# EAGLE board A10-OLinuXino-Lime (EAGLE 6.2), part 1 of 5
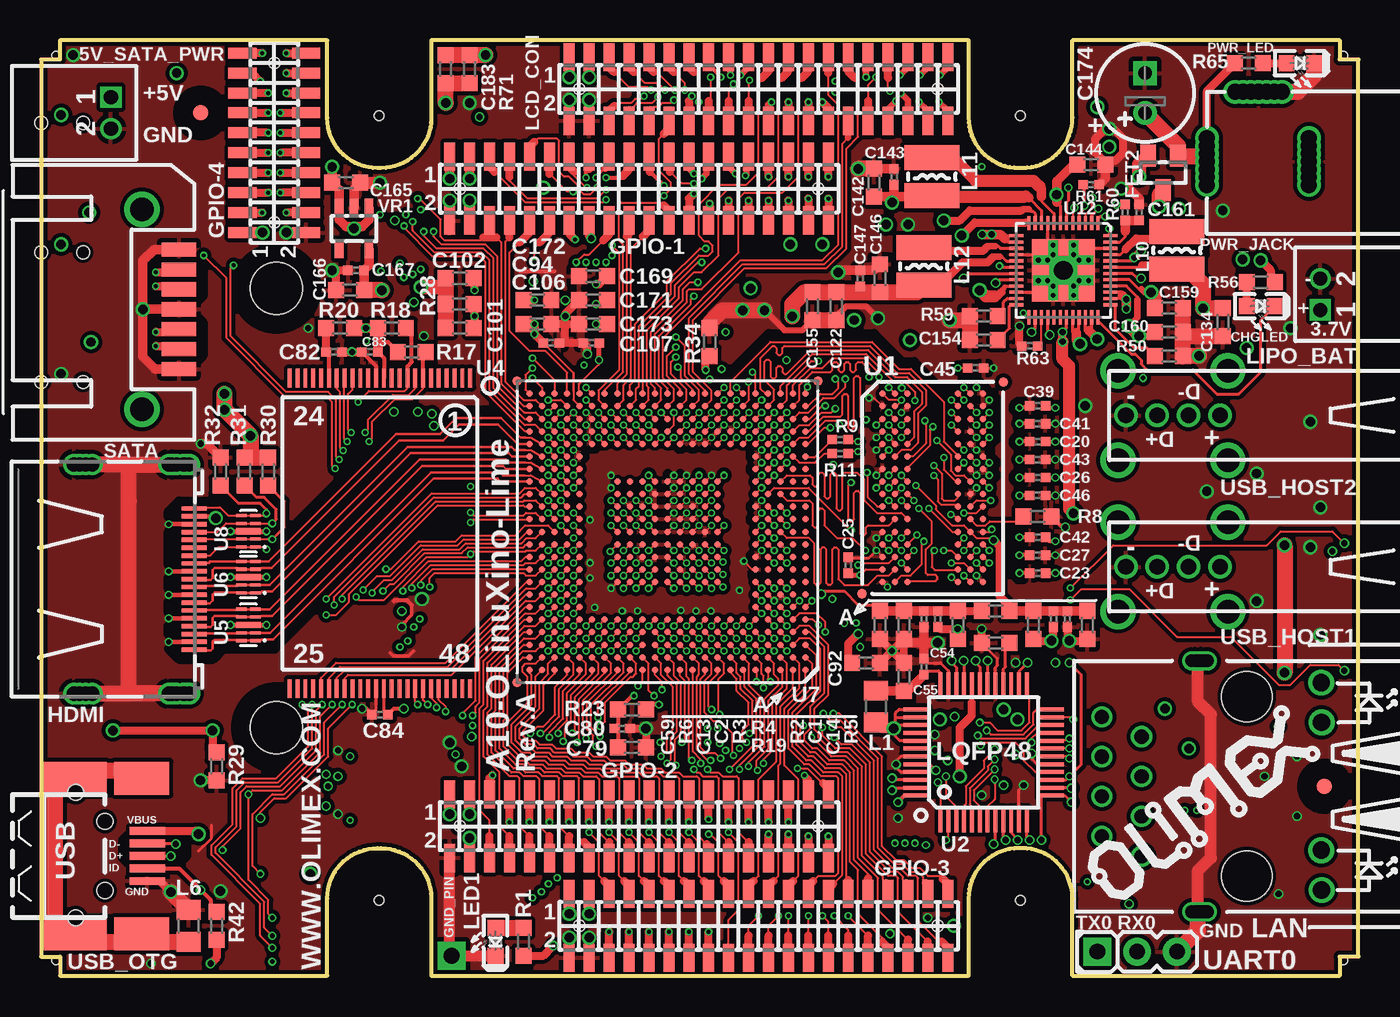
[diagram p0: board, top side]
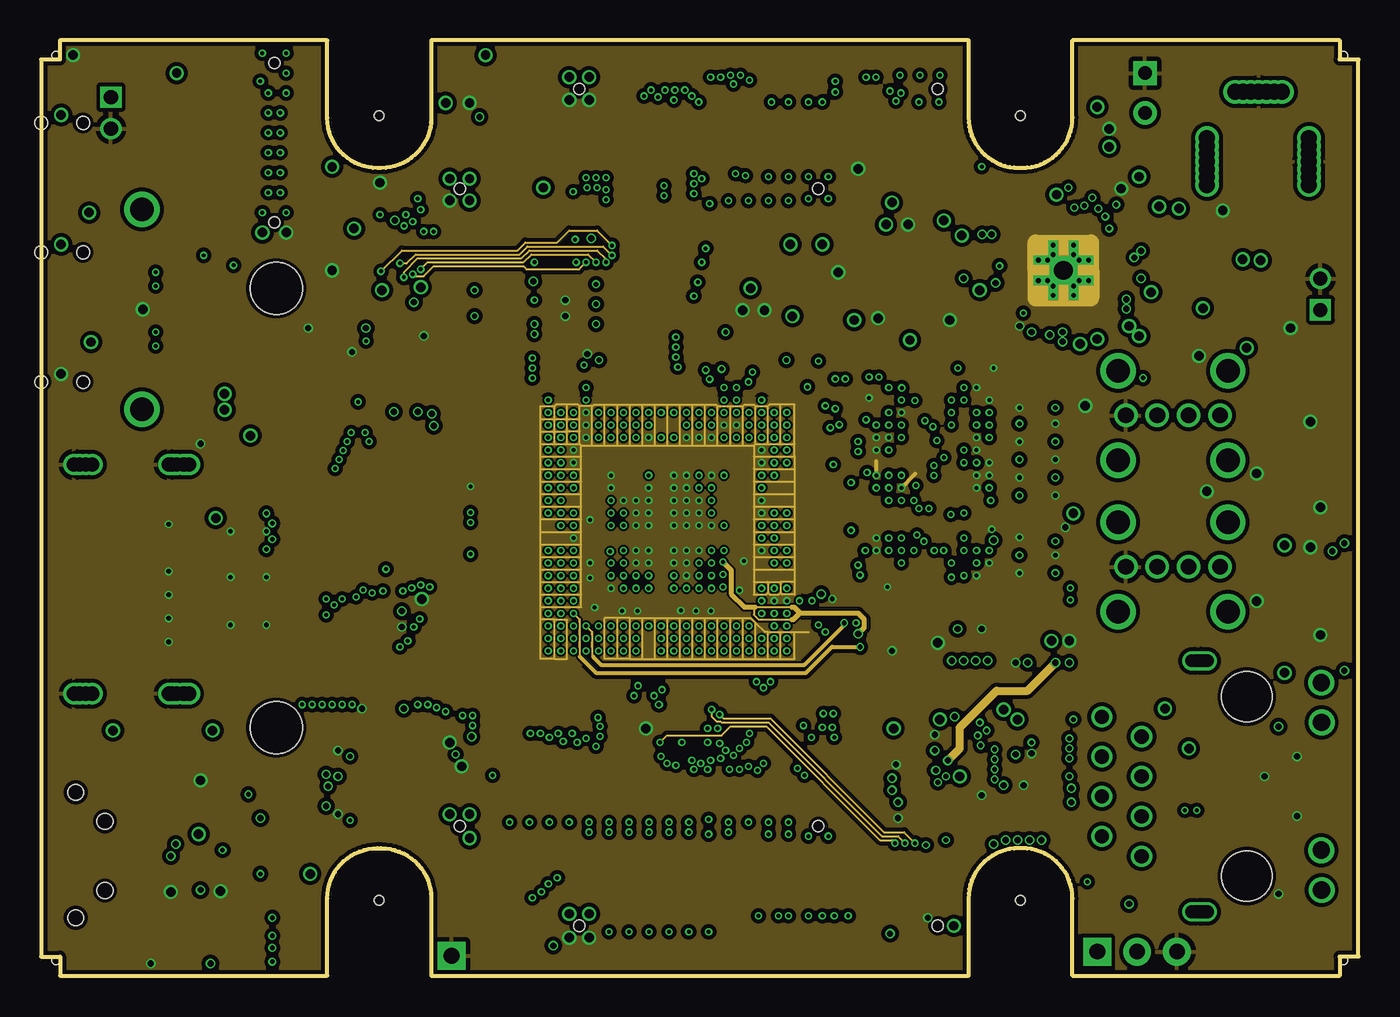
[diagram p1: board, inner layer Route2]
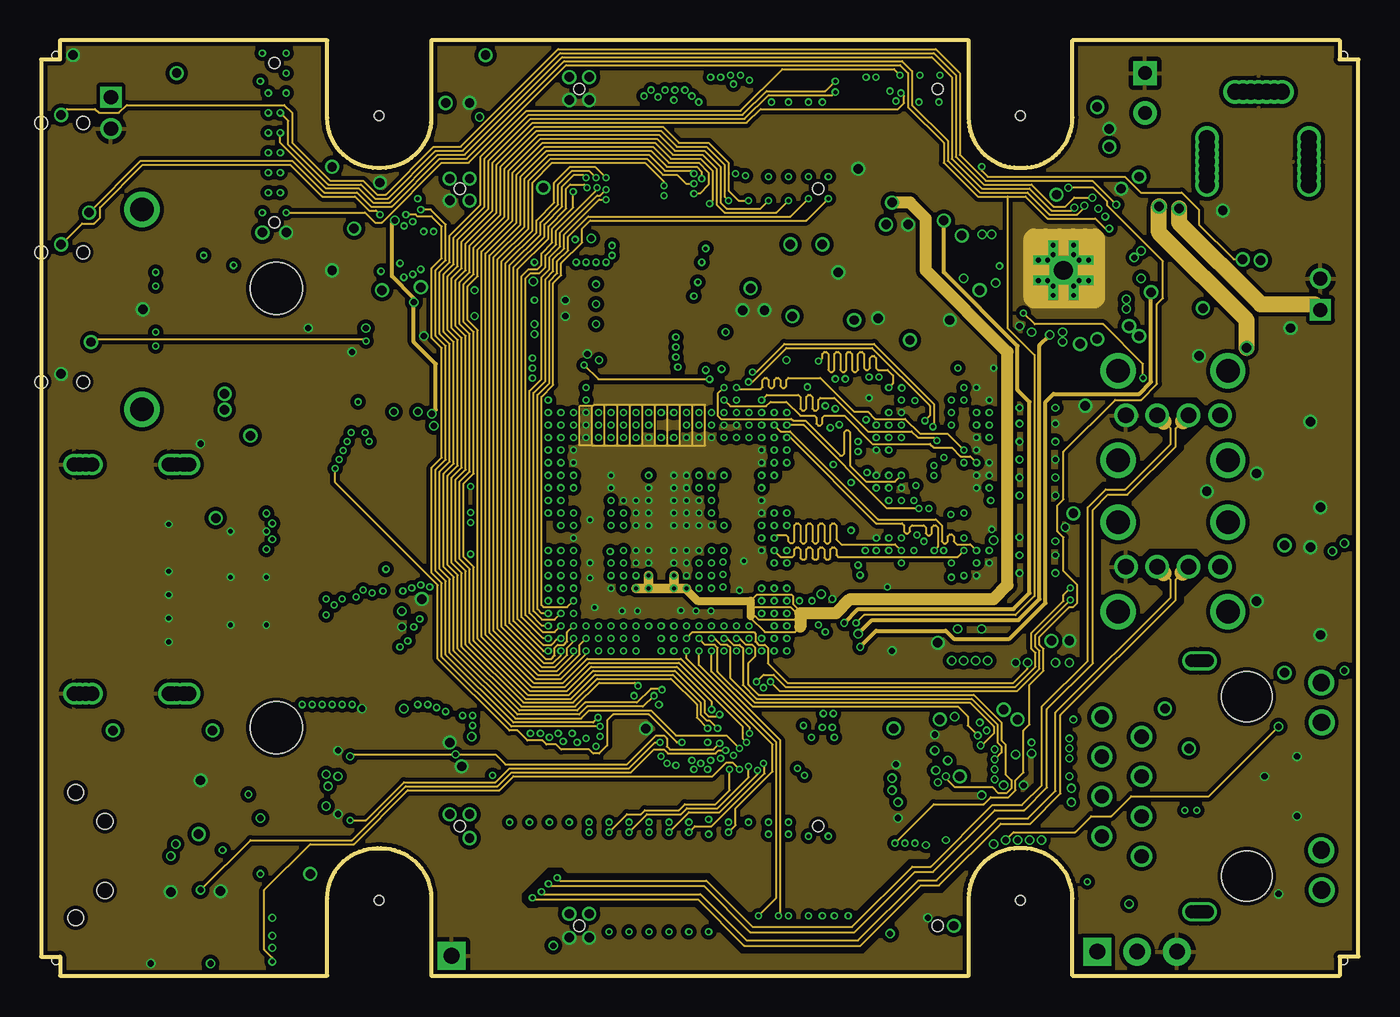
[diagram p2: board, inner layer Route3]
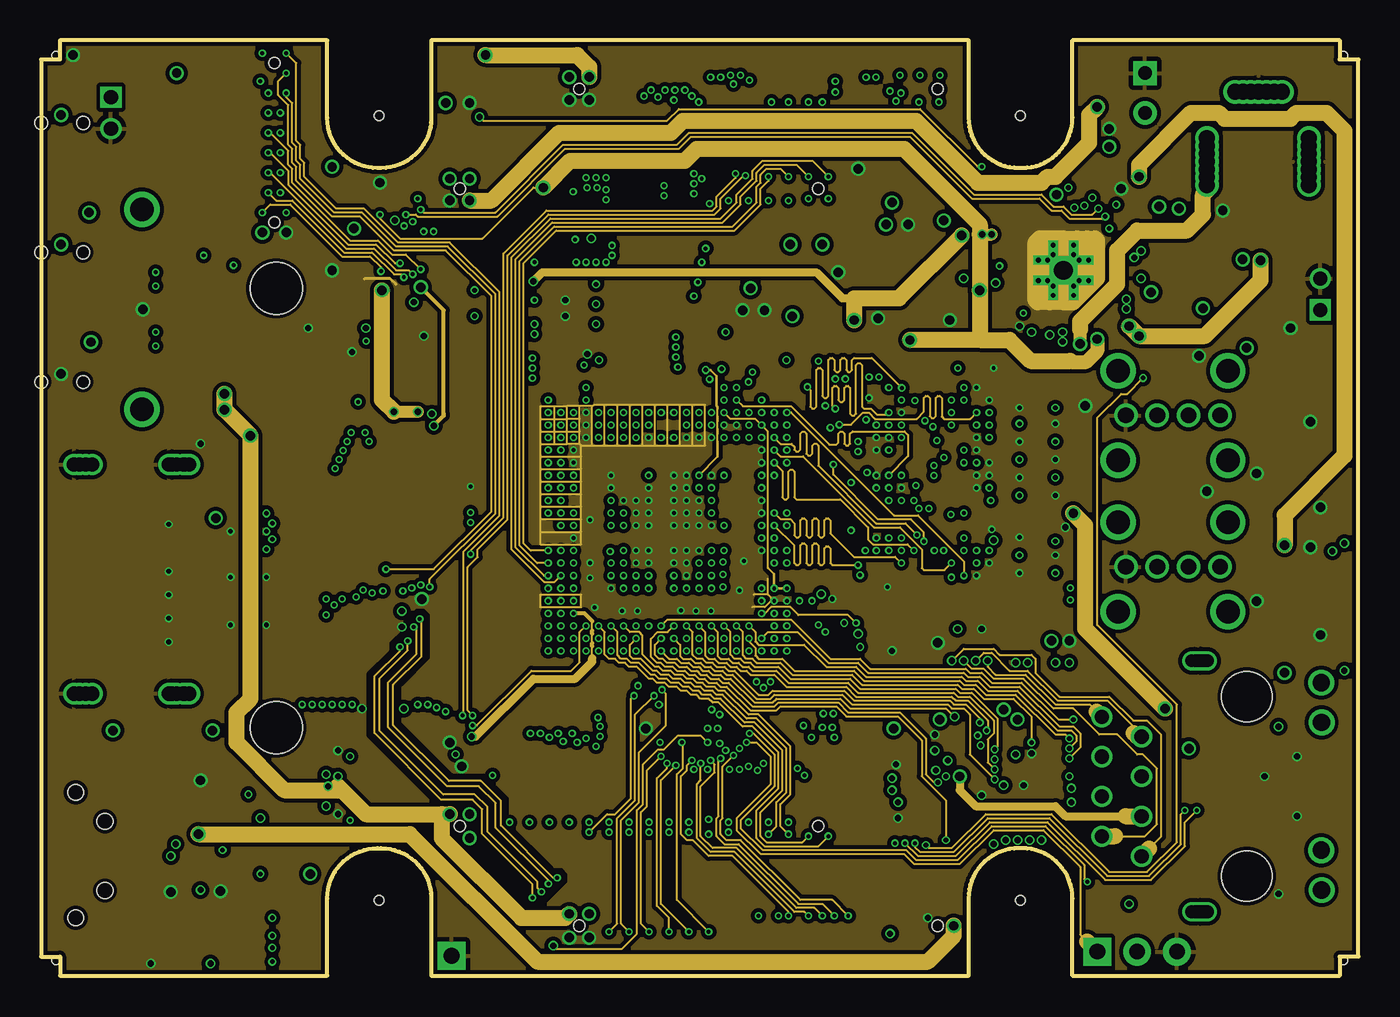
[diagram p3: board, inner layer Route14]
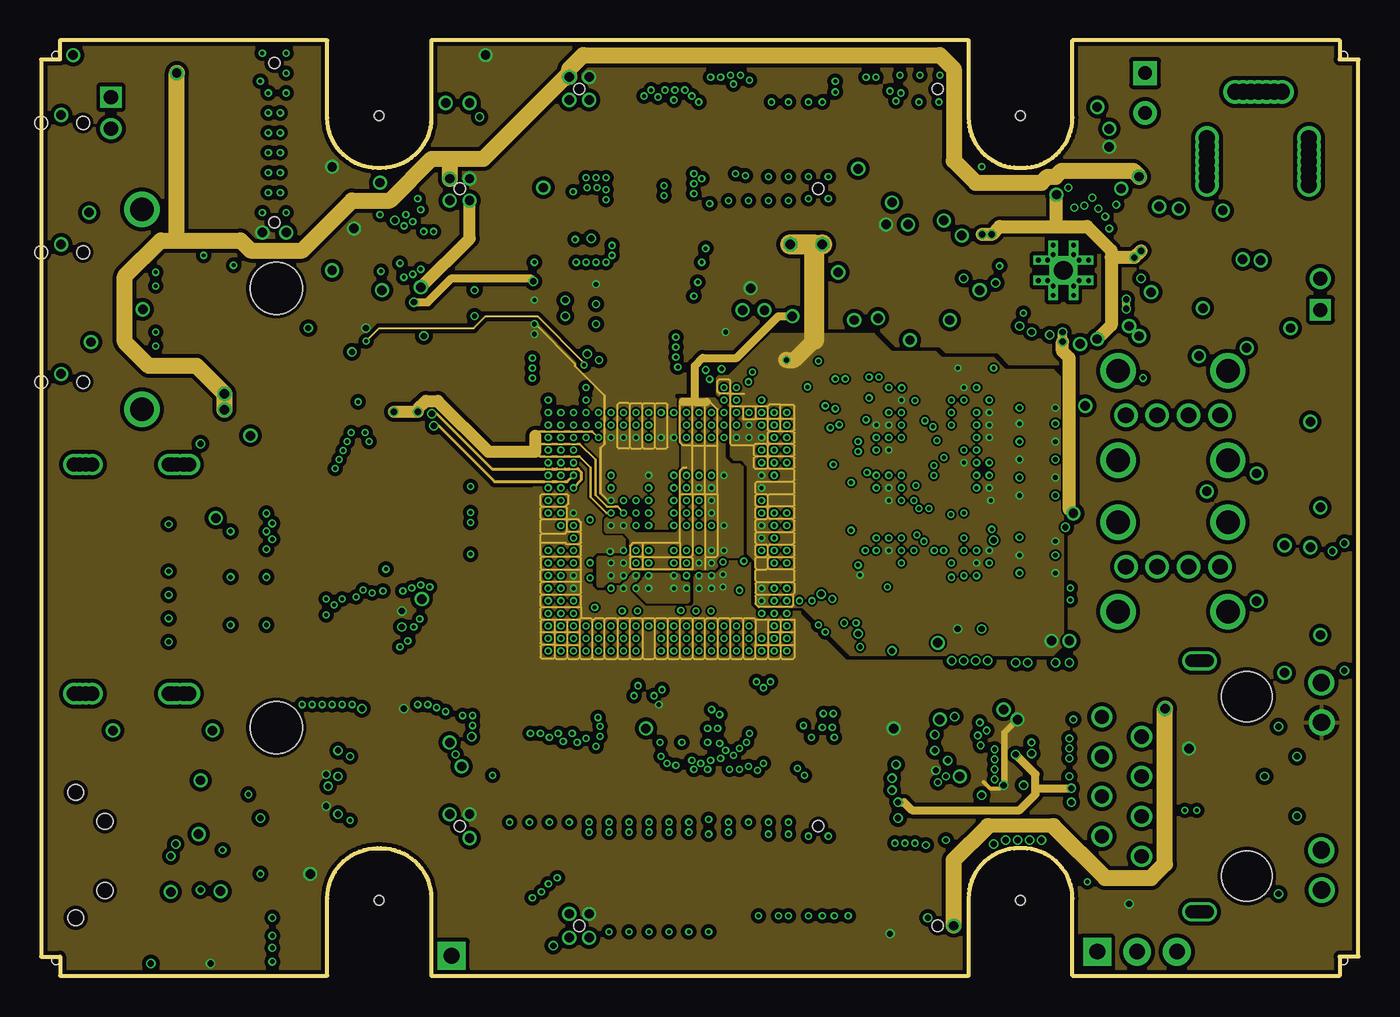
[diagram p4: board, inner layer Route15]
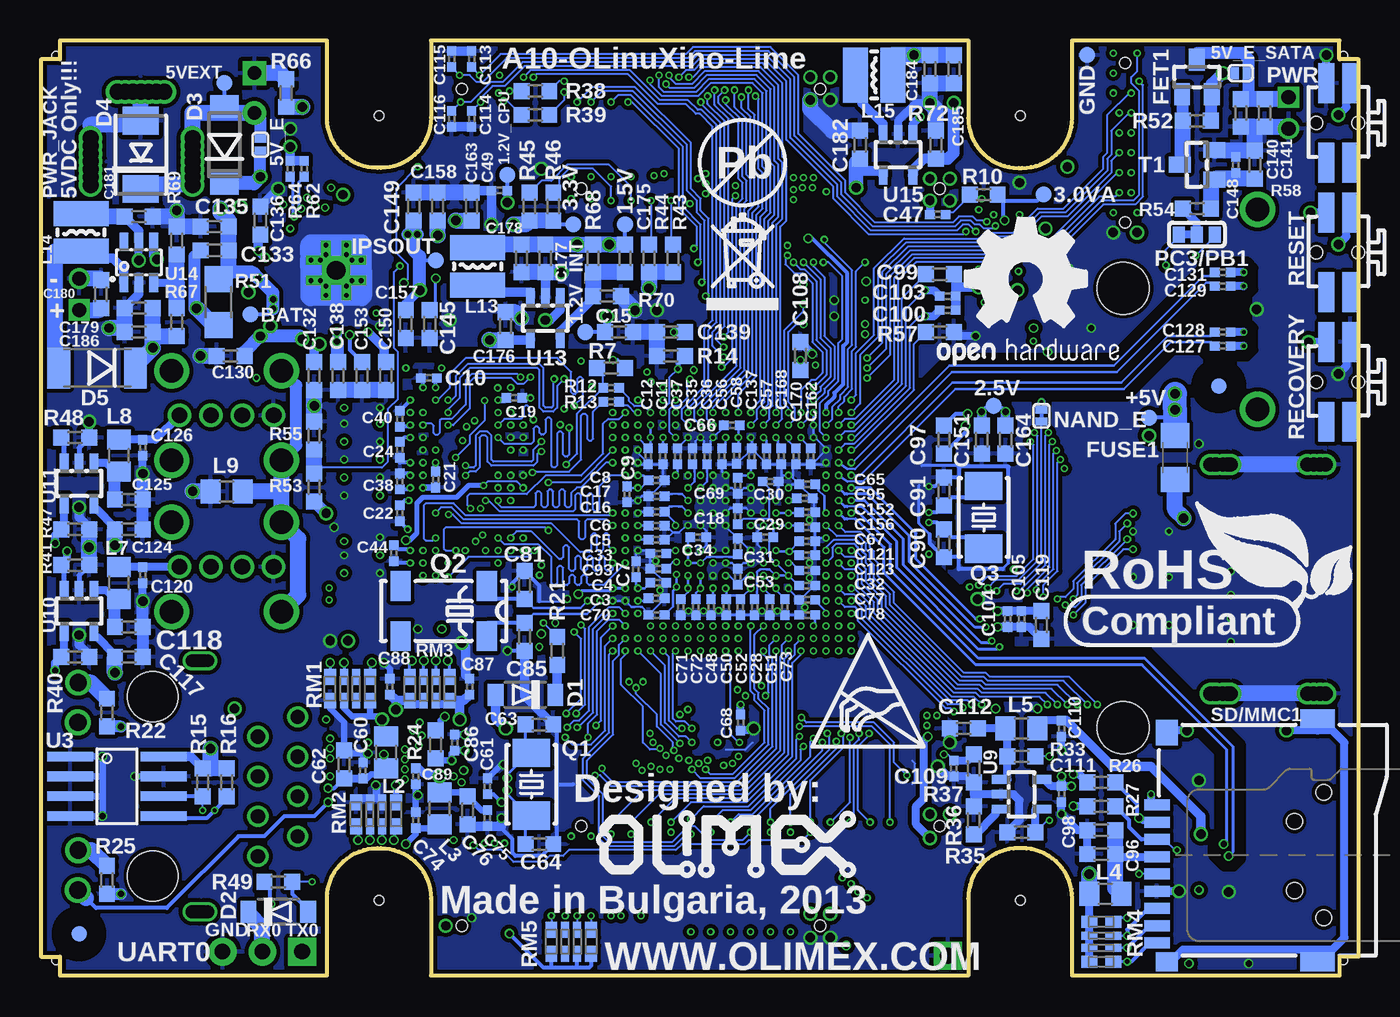
[diagram p5: board, bottom side, seen from below]

Size 83.96 x 59.61 mm. Coordinates in mm from the lower left corner, seen from the top.
Copper layers (1*2*3*14*15*16): Top 0.035mm / dielectric 0.1mm / Route2 0.035mm / dielectric 0.1mm / Route3 0.035mm / dielectric 1mm / Route14 0.035mm / dielectric 0.1mm / Route15 0.035mm / dielectric 0.1mm / Bottom 0.035mm
Design rules: minimum track width 4.5mil, minimum drill 10mil, track to track 5mil, track to pad 5mil, pad to pad 5mil, via to via 5mil, smd to smd 1mil, copper to edge 10mil, drill to drill 8mil, minimum pad ring 6mil, minimum via ring 4mil, stop-mask expansion 4mil, vias tented up to drill 25mil, thermal gap 12mil
tRestrict: 187 lines
bRestrict: 118 lines

## Footprints (pad centres in the part's own frame; a part is rotated, then mirrored left to right if it is on the bottom)
TESTPAD_40-ROUND = smd 1.016 x 1.016: 1 0,0
SJ_1_SMALLER = smd 0.508 x 0.762: 1 -0.381,0; 2 0.381,0
DW02R = drill 0.9 square: 1 -1,0 | drill 0.9: 2 1,0
C0402_TI = smd 0.61 x 0.584: 1 -0.508,0; 2 0.508,0
C0603_DWS = smd 1.016 x 1.016: 1 -0.889,0; 2 0.889,0
E2,5-6,3 = drill 0.864 pad 1.524: + -1.27,0 | drill 0.864 pad 1.524 square: - 1.27,0
LED-0603 = smd 1.016 x 1.016: A 0.889,0; C -0.889,0
SOD-123 = smd 1 x 1.4: A 1.9,0; C -1.9,0
MLL-41 = smd 1.45 x 1.8: A 2.445,0; K -2.445,0
DO214AA = smd 1.778 x 2.286: A 2.177,0; C -2.177,0
MELF-MLL41 = smd 1.45 x 2.6: 1 -2.445,0; 2 2.445,0
SOT23 = smd 1 x 1.4: 1 -0.95,-1.1; 2 0.95,-1.1; 3 0,1.1
1206 = smd 1.6 x 1.8: 1 -1.4,0; 2 1.4,0
TEST_PAD40/70/SQUARE = drill 1.016 pad 1.778 square: P$1 0,0
YA-V36P-2X20-LF = smd 0.7 x 1.8: 1 -12.065,2.032; 2 -12.065,-2.032; 3 -10.795,2.032; 4 -10.795,-2.032; 5 -9.525,2.032; 6 -9.525,-2.032; 7 -8.255,2.032; 8 -8.255,-2.032; 9 -6.985,2.032; 10 -6.985,-2.032; 11 -5.715,2.032; 12 -5.715,-2.032; 13 -4.445,2.032; 14 -4.445,-2.032; 15 -3.175,2.032; 16 -3.175,-2.032; 17 -1.905,2.032; 18 -1.905,-2.032; 19 -0.635,2.032; 20 -0.635,-2.032; 21 0.635,2.032; 22 0.635,-2.032; 23 1.905,2.032; 24 1.905,-2.032; 25 3.175,2.032; 26 3.175,-2.032; 27 4.445,2.032; 28 4.445,-2.032; 29 5.715,2.032; 30 5.715,-2.032; 31 6.985,2.032; 32 6.985,-2.032; 33 8.255,2.032; 34 8.255,-2.032; 35 9.525,2.032; 36 9.525,-2.032; 37 10.795,2.032; 38 10.795,-2.032; 39 12.065,2.032; 40 12.065,-2.032 | hole 0.7: -11.43,0; 11.43,0
YA-V36P-2X10-LF = smd 0.7 x 1.8: 1 -5.715,2.032; 2 -5.715,-2.032; 3 -4.445,2.032; 4 -4.445,-2.032; 5 -3.175,2.032; 6 -3.175,-2.032; 7 -1.905,2.032; 8 -1.905,-2.032; 9 -0.635,2.032; 10 -0.635,-2.032; 11 0.635,2.032; 12 0.635,-2.032; 13 1.905,2.032; 14 1.905,-2.032; 15 3.175,2.032; 16 3.175,-2.032; 17 4.445,2.032; 18 4.445,-2.032; 19 5.715,2.032; 20 5.715,-2.032 | hole 0.7: -5.08,0; 5.08,0
HDMI-SWM-19 = smd 1.6 x 0.28: 1 0.8,4.5; 2 0.8,4; 3 0.8,3.5; 4 0.8,3; 5 0.8,2.5; 6 0.8,2; 7 0.8,1.5; 8 0.8,1; 9 0.8,0.5; 10 0.8,0; 11 0.8,-0.5; 12 0.8,-1; 13 0.8,-1.5; 14 0.8,-2; 15 0.8,-2.5; 16 0.8,-3; 17 0.8,-3.5; 18 0.8,-4; 19 0.8,-4.5 | drill 0.9: P$5 1.5,7.3; P$7 7.7,7.3; P$9 7.7,-7.3; P$11 1.5,-7.3; P$13 1.9,7.3; P$15 8.1,7.3; P$18 8.1,-7.3; P$20 1.9,-7.3; P$21 2.2,7.3; P$22 1.4,7.3; P$23 1.4,-7.3; P$24 2.2,-7.3; P$25 1.1,7.3; P$26 1.1,-7.3; P$27 7.3,-7.3; P$28 7.3,7.3; SH1 2.4,7.3; SH2 8.45,7.3; SH3 8.45,-7.3; SH4 2.4,-7.3
L0805_5MIL_DWS = smd 1.27 x 1.524: 1 -1.016,0; 2 1.016,0
CD32 = smd 3.5 x 1.6: 1 0,1.2; 2 0,-1.2
RJLBC-060TC1_MILLING = drill 0.9: 1 -4.455,6.7; 2 -3.185,9.24; 3 -1.915,6.7; 4 -0.645,9.24; 5 0.625,6.7; 6 1.895,9.24; 7 3.165,6.7; 8 4.435,9.24 | drill 0.8: _1 -8,2.5; _2 -8,2.7; _3 -8,2.9; _4 -8,3.3; _5 -8,3.5; _6 8,3.5; _7 8,3.3; _8 8,2.9; _9 8,2.7; _10 8,2.5; GND1 -8,3.1; GND2 8,3.1 | drill 1.1: AG 4.07,-4.773; AY -6.61,-4.773; KG 6.61,-4.748; KY -4.07,-4.748 | hole 3.2: -5.715,0; 5.715,0
SJ_1_SMALLER_CLOSE_10MILS = smd 0.508 x 0.762: 1 -0.381,0; 2 0.381,0
SJ_2_SMALL_23_TIED = smd 0.762 x 1.016: 1 -1.143,0; 2 0,0; 3 1.143,0
SW_TAKT3X4 = smd 2.54 x 1.016: 1_1 -2.54,0.762; 1_2 2.54,0.762; 2_1 -2.54,-0.762; 2_2 2.54,-0.762 | hole 0.8: 0,-1.397; 0,1.27
PWR_JACK_UNI_MILLING = drill 1: + 0,4.75; +1 0,5.25; +2 0,5.75; +3 0,6.25; +4 0,4.25; +5 0,3.75; +6 0,3.25; - -6.5,4.75; -1 -6.5,5.25; -2 -6.5,5.75; -3 -6.5,4.25; -4 -6.5,3.75; -5 -6.5,6.25; -6 -6.5,3.25; -- -3.3,0.3; --1 -3.8,0.3; --2 -4.3,0.3; --3 -4.8,0.3; --4 -2.8,0.3; --5 -2.3,0.3; --6 -1.8,0.3
HCX-4S = smd 1.8 x 2.4: 1 -2,0; 2 2,0
MC-306 = smd 1.3 x 1.9: 1 -2.75,-1.6; 2 2.75,-1.6; 3 2.75,1.6; 4 -2.75,1.6
R0603_5MIL_DWS = smd 1.016 x 1.016: 1 -0.889,0; 2 0.889,0
R0402_TI = smd 0.61 x 0.584: 1 -0.508,0; 2 0.508,0
R1206_5MIL_WS = smd 1.651 x 1.778: 1 -1.46,0; 2 1.46,0
0603_0R = smd 1.016 x 1.016: 1 -0.889,0; 2 0.889,0
R_MATRIX_4 = smd 1.016 x 0.762: 1.1 -0.762,1.27; 1.2 0.762,1.27; 4.1 -0.762,-1.27; 4.2 0.762,-1.27 | smd 1.016 x 0.508: 2.1 -0.762,0.381; 2.2 0.762,0.381; 3.1 -0.762,-0.381; 3.2 0.762,-0.381
SATA-PWA-07 = smd 0.9 x 2.2: 1 4.5,1; 2 5.77,1; 3 7.04,1; 4 8.31,1; 5 9.58,1; 6 10.85,1; 7 12.12,1 | drill 1.5: P$8 1.94,3.36; P$9 14.68,3.36
TFC-WPAPR-08 = smd 0.7 x 1.6: 1 -3.2,-0.125; 2 -2.1,-0.125; 3 -1,-0.125; 4 0.1,-0.125; 5 1.2,-0.125; 6 2.3,-0.125; 7 3.4,-0.125; 8 4.5,-0.125; 9 5.6,-0.125 | smd 1.2 x 1.4: 10 6.8,0.5 | smd 1.6 x 1.4: 11 -7.8,0.5 | smd 1.2 x 2.2: 12 6.8,10.1; 13 -8.7,10.1 | hole 1: 4,10.5; -4,10.5
FBGA96_MEM = smd 0.4 x 0.4: A1 -3.2,6; A2 -2.4,6; A3 -1.6,6; A7 1.6,6; A8 2.4,6; A9 3.2,6; B1 -3.2,5.2; B2 -2.4,5.2; B3 -1.6,5.2; B7 1.6,5.2; B8 2.4,5.2; B9 3.2,5.2; C1 -3.2,4.4; C2 -2.4,4.4; C3 -1.6,4.4; C7 1.6,4.4; C8 2.4,4.4; C9 3.2,4.4; D1 -3.2,3.6; D2 -2.4,3.6; D3 -1.6,3.6; D7 1.6,3.6; D8 2.4,3.6; D9 3.2,3.6; E1 -3.2,2.8; E2 -2.4,2.8; E3 -1.6,2.8; E7 1.6,2.8; E8 2.4,2.8; E9 3.2,2.8; F1 -3.2,2; F2 -2.4,2; F3 -1.6,2; F7 1.6,2; F8 2.4,2; F9 3.2,2; G1 -3.2,1.2; G2 -2.4,1.2; G3 -1.6,1.2; G7 1.6,1.2; G8 2.4,1.2; G9 3.2,1.2; H1 -3.2,0.4; H2 -2.4,0.4; H3 -1.6,0.4; H7 1.6,0.4; H8 2.4,0.4; H9 3.2,0.4; J1 -3.2,-0.4; J2 -2.4,-0.4; J3 -1.6,-0.4; J7 1.6,-0.4; J8 2.4,-0.4; J9 3.2,-0.4; K1 -3.2,-1.2; K2 -2.4,-1.2; K3 -1.6,-1.2; K7 1.6,-1.2; K8 2.4,-1.2; K9 3.2,-1.2; L1 -3.2,-2; L2 -2.4,-2; L3 -1.6,-2; L7 1.6,-2; L8 2.4,-2; L9 3.2,-2; M1 -3.2,-2.8; M2 -2.4,-2.8; M3 -1.6,-2.8; M7 1.6,-2.8; M8 2.4,-2.8; M9 3.2,-2.8; N1 -3.2,-3.6; N2 -2.4,-3.6; N3 -1.6,-3.6; N7 1.6,-3.6; N8 2.4,-3.6; N9 3.2,-3.6; P1 -3.2,-4.4; P2 -2.4,-4.4; P3 -1.6,-4.4; P7 1.6,-4.4; P8 2.4,-4.4; P9 3.2,-4.4; R1 -3.2,-5.2; R2 -2.4,-5.2; R3 -1.6,-5.2; R7 1.6,-5.2; R8 2.4,-5.2; R9 3.2,-5.2; T1 -3.2,-6; T2 -2.4,-6; T3 -1.6,-6; T7 1.6,-6; T8 2.4,-6; T9 3.2,-6 | smd 0.6 x 0.6: FID1 -4.5,-6.75; FID2 4.5,6.75
LQFP48 = smd 0.254 x 1.6: 1 -2.75,-4.3; 2 -2.25,-4.3; 3 -1.75,-4.3; 4 -1.25,-4.3; 5 -0.75,-4.3; 6 -0.25,-4.3; 7 0.25,-4.3; 8 0.75,-4.3; 9 1.25,-4.3; 10 1.75,-4.3; 11 2.25,-4.3; 12 2.75,-4.3; 25 2.75,4.3; 26 2.25,4.3; 27 1.75,4.3; 28 1.25,4.3; 29 0.75,4.3; 30 0.25,4.3; 31 -0.25,4.3; 32 -0.75,4.3; 33 -1.25,4.3; 34 -1.75,4.3; 35 -2.25,4.3; 36 -2.75,4.3 | smd 1.6 x 0.254: 13 4.3,-2.75; 14 4.3,-2.25; 15 4.3,-1.75; 16 4.3,-1.25; 17 4.3,-0.75; 18 4.3,-0.25; 19 4.3,0.25; 20 4.3,0.75; 21 4.3,1.25; 22 4.3,1.75; 23 4.3,2.25; 24 4.3,2.75; 37 -4.3,2.75; 38 -4.3,2.25; 39 -4.3,1.75; 40 -4.3,1.25; 41 -4.3,0.75; 42 -4.3,0.25; 43 -4.3,-0.25; 44 -4.3,-0.75; 45 -4.3,-1.25; 46 -4.3,-1.75; 47 -4.3,-2.25; 48 -4.3,-2.75
SO-08MN = smd 0.61 x 2.921: 1 -1.905,-2.981; 2 -0.635,-2.981; 3 0.635,-2.981; 4 1.905,-2.981; 5 1.905,2.981; 6 0.635,2.981; 7 -0.635,2.981; 8 -1.905,2.981
TSOP48 = smd 0.25 x 1.2: 1 -5.75,-9.9; 2 -5.25,-9.9; 3 -4.75,-9.9; 4 -4.25,-9.9; 5 -3.75,-9.9; 6 -3.25,-9.9; 7 -2.75,-9.9; 8 -2.25,-9.9; 9 -1.75,-9.9; 10 -1.25,-9.9; 11 -0.75,-9.9; 12 -0.25,-9.9; 13 0.25,-9.9; 14 0.75,-9.9; 15 1.25,-9.9; 16 1.75,-9.9; 17 2.25,-9.9; 18 2.75,-9.9; 19 3.25,-9.9; 20 3.75,-9.9; 21 4.25,-9.9; 22 4.75,-9.9; 23 5.25,-9.9; 24 5.75,-9.9; 25 5.75,9.9; 26 5.25,9.9; 27 4.75,9.9; 28 4.25,9.9; 29 3.75,9.9; 30 3.25,9.9; 31 2.75,9.9; 32 2.25,9.9; 33 1.75,9.9; 34 1.25,9.9; 35 0.75,9.9; 36 0.25,9.9; 37 -0.25,9.9; 38 -0.75,9.9; 39 -1.25,9.9; 40 -1.75,9.9; 41 -2.25,9.9; 42 -2.75,9.9; 43 -3.25,9.9; 44 -3.75,9.9; 45 -4.25,9.9; 46 -4.75,9.9; 47 -5.25,9.9; 48 -5.75,9.9
SLP2510P8 = smd 0.2 x 0.675: 1 -1,-0.438; 2 -0.5,-0.438; 4 0.5,-0.438; 5 1,-0.438; 6 1,0.438; 7 0.5,0.438; 9 -0.5,0.438; 10 -1,0.438 | smd 0.4 x 0.775: 3 0,-0.388; 8 0,0.388
TFBGA441 = smd 0.4 x 0.4: A1 -8.8,8.8; A2 -8,8.8; A3 -7.2,8.8; A4 -6.4,8.8; A5 -5.6,8.8; A6 -4.8,8.8; A7 -4,8.8; A8 -3.2,8.8; A9 -2.4,8.8; A10 -1.6,8.8; A11 -0.8,8.8; A12 0,8.8; A13 0.8,8.8; A14 1.6,8.8; A15 2.4,8.8; A16 3.2,8.8; A17 4,8.8; A18 4.8,8.8; A19 5.6,8.8; A20 6.4,8.8; A21 7.2,8.8; A22 8,8.8; A23 8.8,8.8; AA1 -8.8,-7.2; AA2 -8,-7.2; AA3 -7.2,-7.2; AA4 -6.4,-7.2; AA5 -5.6,-7.2; AA6 -4.8,-7.2; AA7 -4,-7.2; AA8 -3.2,-7.2; AA9 -2.4,-7.2; AA10 -1.6,-7.2; AA11 -0.8,-7.2; AA12 0,-7.2; AA13 0.8,-7.2; AA14 1.6,-7.2; AA15 2.4,-7.2; AA16 3.2,-7.2; AA17 4,-7.2; AA18 4.8,-7.2; AA19 5.6,-7.2; AA20 6.4,-7.2; AA21 7.2,-7.2; AA22 8,-7.2; AA23 8.8,-7.2; AB1 -8.8,-8; AB2 -8,-8; AB3 -7.2,-8; AB4 -6.4,-8; AB5 -5.6,-8; AB6 -4.8,-8; AB7 -4,-8; AB8 -3.2,-8; AB9 -2.4,-8; AB10 -1.6,-8; AB11 -0.8,-8; AB12 0,-8; AB13 0.8,-8; AB14 1.6,-8; AB15 2.4,-8; AB16 3.2,-8; AB17 4,-8; AB18 4.8,-8; AB19 5.6,-8; AB20 6.4,-8; AB21 7.2,-8; AB22 8,-8; AB23 8.8,-8; AC1 -8.8,-8.8; AC2 -8,-8.8; AC3 -7.2,-8.8; AC4 -6.4,-8.8; AC5 -5.6,-8.8; AC6 -4.8,-8.8; AC7 -4,-8.8; AC8 -3.2,-8.8; AC9 -2.4,-8.8; AC10 -1.6,-8.8; AC11 -0.8,-8.8; AC12 0,-8.8; AC13 0.8,-8.8; AC14 1.6,-8.8; AC15 2.4,-8.8; AC16 3.2,-8.8; AC17 4,-8.8; AC18 4.8,-8.8; AC19 5.6,-8.8; AC20 6.4,-8.8; AC21 7.2,-8.8; AC22 8,-8.8; AC23 8.8,-8.8; B1 -8.8,8; B2 -8,8; B3 -7.2,8; B4 -6.4,8; B5 -5.6,8; B6 -4.8,8; B7 -4,8; B8 -3.2,8; B9 -2.4,8; B10 -1.6,8; B11 -0.8,8; B12 0,8; B13 0.8,8; B14 1.6,8; B15 2.4,8; B16 3.2,8; B17 4,8; B18 4.8,8; B19 5.6,8; B20 6.4,8; B21 7.2,8; B22 8,8; B23 8.8,8; C1 -8.8,7.2; C2 -8,7.2; C3 -7.2,7.2; C4 -6.4,7.2; C5 -5.6,7.2; C6 -4.8,7.2; C7 -4,7.2; C8 -3.2,7.2; C9 -2.4,7.2; C10 -1.6,7.2; C11 -0.8,7.2; C12 0,7.2; C13 0.8,7.2; C14 1.6,7.2; C15 2.4,7.2; C16 3.2,7.2; C17 4,7.2; C18 4.8,7.2; C19 5.6,7.2; C20 6.4,7.2; C21 7.2,7.2; C22 8,7.2; C23 8.8,7.2; D1 -8.8,6.4; D2 -8,6.4; D3 -7.2,6.4; D4 -6.4,6.4; D5 -5.6,6.4; D6 -4.8,6.4; D7 -4,6.4; D8 -3.2,6.4; D9 -2.4,6.4; D10 -1.6,6.4; D11 -0.8,6.4; D12 0,6.4; D13 0.8,6.4; D14 1.6,6.4; D15 2.4,6.4; D16 3.2,6.4; D17 4,6.4; D18 4.8,6.4; D19 5.6,6.4; D20 6.4,6.4; D21 7.2,6.4; D22 8,6.4; D23 8.8,6.4; E1 -8.8,5.6; E2 -8,5.6; E3 -7.2,5.6; E4 -6.4,5.6; E5 -5.6,5.6; E6 -4.8,5.6; E7 -4,5.6; E8 -3.2,5.6; E9 -2.4,5.6; E10 -1.6,5.6; E11 -0.8,5.6; E12 0,5.6; E13 0.8,5.6; E14 1.6,5.6; E15 2.4,5.6; E16 3.2,5.6; E17 4,5.6; E18 4.8,5.6; E19 5.6,5.6; E20 6.4,5.6; E21 7.2,5.6; E22 8,5.6; E23 8.8,5.6; F1 -8.8,4.8; F2 -8,4.8; F3 -7.2,4.8; F4 -6.4,4.8; F5 -5.6,4.8; F19 5.6,4.8; F20 6.4,4.8; F21 7.2,4.8; F22 8,4.8; F23 8.8,4.8; G1 -8.8,4; G2 -8,4; G3 -7.2,4; G4 -6.4,4; G5 -5.6,4; G19 5.6,4; G20 6.4,4; G21 7.2,4; G22 8,4; G23 8.8,4; H1 -8.8,3.2; H2 -8,3.2; H3 -7.2,3.2; H4 -6.4,3.2; H5 -5.6,3.2; H8 -3.2,3.2; H9 -2.4,3.2; H10 -1.6,3.2; H11 -0.8,3.2; H12 0,3.2; H13 0.8,3.2; H14 1.6,3.2; H15 2.4,3.2; H16 3.2,3.2; H19 5.6,3.2; H20 6.4,3.2; H21 7.2,3.2; H22 8,3.2; H23 8.8,3.2; J1 -8.8,2.4; J2 -8,2.4; J3 -7.2,2.4; J4 -6.4,2.4; J5 -5.6,2.4; J8 -3.2,2.4; J9 -2.4,2.4; J10 -1.6,2.4; J11 -0.8,2.4; J12 0,2.4; J13 0.8,2.4; J14 1.6,2.4; J15 2.4,2.4; J16 3.2,2.4; J19 5.6,2.4; J20 6.4,2.4; J21 7.2,2.4; J22 8,2.4; J23 8.8,2.4; K1 -8.8,1.6; K2 -8,1.6; K3 -7.2,1.6; K4 -6.4,1.6; K5 -5.6,1.6; K8 -3.2,1.6; K9 -2.4,1.6; K10 -1.6,1.6; K11 -0.8,1.6; K12 0,1.6; K13 0.8,1.6; K14 1.6,1.6; K15 2.4,1.6; K16 3.2,1.6; K19 5.6,1.6; K20 6.4,1.6; K21 7.2,1.6; K22 8,1.6; K23 8.8,1.6; L1 -8.8,0.8; L2 -8,0.8; L3 -7.2,0.8; L4 -6.4,0.8; L5 -5.6,0.8; L8 -3.2,0.8; L9 -2.4,0.8; L10 -1.6,0.8; L11 -0.8,0.8; L12 0,0.8; L13 0.8,0.8; L14 1.6,0.8; L15 2.4,0.8; L16 3.2,0.8; L19 5.6,0.8; L20 6.4,0.8; L21 7.2,0.8; L22 8,0.8; L23 8.8,0.8; M1 -8.8,0; M2 -8,0; M3 -7.2,0; M4 -6.4,0; M5 -5.6,0; M8 -3.2,0; M9 -2.4,0; M10 -1.6,0; M11 -0.8,0; M12 0,0; M13 0.8,0; M14 1.6,0; M15 2.4,0; M16 3.2,0; M19 5.6,0; M20 6.4,0; M21 7.2,0; M22 8,0; M23 8.8,0; N1 -8.8,-0.8; N2 -8,-0.8; N3 -7.2,-0.8; N4 -6.4,-0.8; N5 -5.6,-0.8; N8 -3.2,-0.8; N9 -2.4,-0.8; N10 -1.6,-0.8; N11 -0.8,-0.8; N12 0,-0.8; N13 0.8,-0.8; N14 1.6,-0.8; N15 2.4,-0.8; N16 3.2,-0.8; N19 5.6,-0.8; N20 6.4,-0.8; N21 7.2,-0.8; N22 8,-0.8; N23 8.8,-0.8; P1 -8.8,-1.6; P2 -8,-1.6; P3 -7.2,-1.6; P4 -6.4,-1.6; P5 -5.6,-1.6; P8 -3.2,-1.6; P9 -2.4,-1.6; P10 -1.6,-1.6; P11 -0.8,-1.6; P12 0,-1.6; P13 0.8,-1.6; P14 1.6,-1.6; P15 2.4,-1.6; P16 3.2,-1.6; P19 5.6,-1.6; P20 6.4,-1.6; P21 7.2,-1.6; P22 8,-1.6; P23 8.8,-1.6; R1 -8.8,-2.4; R2 -8,-2.4; R3 -7.2,-2.4; R4 -6.4,-2.4; R5 -5.6,-2.4; R8 -3.2,-2.4; R9 -2.4,-2.4; R10 -1.6,-2.4; R11 -0.8,-2.4; R12 0,-2.4; R13 0.8,-2.4; R14 1.6,-2.4; R15 2.4,-2.4; R16 3.2,-2.4; R19 5.6,-2.4; R20 6.4,-2.4; R21 7.2,-2.4; R22 8,-2.4; R23 8.8,-2.4; T1 -8.8,-3.2; T2 -8,-3.2; T3 -7.2,-3.2; T4 -6.4,-3.2; T5 -5.6,-3.2; T8 -3.2,-3.2; T9 -2.4,-3.2; T10 -1.6,-3.2; T11 -0.8,-3.2; T12 0,-3.2; T13 0.8,-3.2; T14 1.6,-3.2; T15 2.4,-3.2; T16 3.2,-3.2; T19 5.6,-3.2; T20 6.4,-3.2; T21 7.2,-3.2; T22 8,-3.2; T23 8.8,-3.2; U1 -8.8,-4; U2 -8,-4; U3 -7.2,-4; U4 -6.4,-4; U5 -5.6,-4; U19 5.6,-4; U20 6.4,-4; U21 7.2,-4; U22 8,-4; U23 8.8,-4; V1 -8.8,-4.8; V2 -8,-4.8; V3 -7.2,-4.8; V4 -6.4,-4.8; V5 -5.6,-4.8; V19 5.6,-4.8; V20 6.4,-4.8; V21 7.2,-4.8; V22 8,-4.8; V23 8.8,-4.8; W1 -8.8,-5.6; W2 -8,-5.6; W3 -7.2,-5.6; W4 -6.4,-5.6; W5 -5.6,-5.6; W6 -4.8,-5.6; W7 -4,-5.6; W8 -3.2,-5.6; W9 -2.4,-5.6; W10 -1.6,-5.6; W11 -0.8,-5.6; W12 0,-5.6; W13 0.8,-5.6; W14 1.6,-5.6; W15 2.4,-5.6; W16 3.2,-5.6; W17 4,-5.6; W18 4.8,-5.6; W19 5.6,-5.6; W20 6.4,-5.6; W21 7.2,-5.6; W22 8,-5.6; W23 8.8,-5.6; Y1 -8.8,-6.4; Y2 -8,-6.4; Y3 -7.2,-6.4; Y4 -6.4,-6.4; Y5 -5.6,-6.4; Y6 -4.8,-6.4; Y7 -4,-6.4; Y8 -3.2,-6.4; Y9 -2.4,-6.4; Y10 -1.6,-6.4; Y11 -0.8,-6.4; Y12 0,-6.4; Y13 0.8,-6.4; Y14 1.6,-6.4; Y15 2.4,-6.4; Y16 3.2,-6.4; Y17 4,-6.4; Y18 4.8,-6.4; Y19 5.6,-6.4; Y20 6.4,-6.4; Y21 7.2,-6.4; Y22 8,-6.4; Y23 8.8,-6.4 | smd 0.6 x 0.6: FID1 9.6,9.6; FID2 9.6,-9.6; FID3 -9.6,-9.6
SOT23-5 = smd 0.55 x 1.2: 1 -0.95,-1.3; 2 0,-1.3; 3 0.95,-1.3; 4 0.95,1.3; 5 -0.95,1.3
QFN48 = smd 0.2 x 0.9: 1 -2.2,-3; 2 -1.8,-3; 3 -1.4,-3; 4 -1,-3; 5 -0.6,-3; 6 -0.2,-3; 7 0.2,-3; 8 0.6,-3; 9 1,-3; 10 1.4,-3; 11 1.8,-3; 12 2.2,-3; 25 2.2,3; 26 1.8,3; 27 1.4,3; 28 1,3; 29 0.6,3; 30 0.2,3; 31 -0.2,3; 32 -0.6,3; 33 -1,3; 34 -1.4,3; 35 -1.8,3; 36 -2.2,3 | smd 0.9 x 0.2: 13 3,-2.2; 14 3,-1.8; 15 3,-1.4; 16 3,-1; 17 3,-0.6; 18 3,-0.2; 19 3,0.2; 20 3,0.6; 21 3,1; 22 3,1.4; 23 3,1.8; 24 3,2.2; 37 -3,2.2; 38 -3,1.8; 39 -3,1.4; 40 -3,1; 41 -3,0.6; 42 -3,0.2; 43 -3,-0.2; 44 -3,-0.6; 45 -3,-1; 46 -3,-1.4; 47 -3,-1.8; 48 -3,-2.2 | drill 1.2 pad 1.422 square: N1 0,0 | drill 0.3 pad 0.4 square: N2 -1.6,0.65; N3 -1,0.65; N4 -1.6,-0.65; N5 -1,-0.65; N6 -0.65,-1.6; N7 -0.65,-1; N8 0.65,-1.6; N9 0.65,-1; N10 1.6,-0.65; N11 1,-0.65; N12 1.6,0.65; N13 1,0.65; N14 0.65,1.6; N15 0.65,1; N16 -0.65,1.6; N17 -0.65,1 | smd 4 x 4: VSS 0,0
SOT23-6 = smd 0.55 x 1.2: 1 -0.95,-1.3; 2 0,-1.3; 3 0.95,-1.3; 4 0.95,1.3; 5 0,1.3; 6 -0.95,1.3
FIDUCIAL-1X3 = smd 1 x 1: 1 0,0
HAMMOND_1593LBK_A10_LIME = hole 3.3: 14.98,15.81; 14.98,43.81 | hole 0.6: 21.55,4.81; 21.55,54.81; 62.41,4.81; 62.41,54.81 | hole 0.5: 0.95,58.66; 83.01,58.66; 83.01,0.95; 0.95,0.95
HN1X3 = drill 1 pad 1.778 square: 1 -2.54,0 | drill 1 pad 1.778: 2 0,0; 3 2.54,0
USB_A_VERTICAL_PTH = drill 1: 1 3.45,12.75; 2 3.45,14.75; 3 3.45,16.75; 4 3.45,18.75 | drill 1.5: P$1 0.6,12.25; P$2 6.3,12.25; P$3 6.3,19.25; P$4 0.6,19.25
USB_MINI_9PIN = smd 2.25 x 0.5: D+ 2.706,0; D- 2.706,0.8; GND 2.706,-1.6; ID 2.706,-0.8; VBUS 2.706,1.6 | smd 4 x 2.1: GND1 -1.9,4.95; GND3 -1.9,-4.95 | smd 3.5 x 2.1: GND2 2.35,4.95; GND4 2.35,-4.95 | hole 1: 0,2.2; 0,-2.2
SOT-23-5 = smd 0.55 x 1.2: 1 -0.95,-1.3; 2 0,-1.3; 3 0.95,-1.3; 4 0.95,1.3; 5 -0.95,1.3

## Placement (x,y rotation side)
1.2V_CPU  TESTPADTESTPAD_40-ROUND  [TESTPAD_40-ROUND]  54.23,51.05 0 bottom
1.2V_INT  TESTPADTESTPAD_40-ROUND  [TESTPAD_40-ROUND]  49.28,41.02 0 bottom
1.5V  TESTPADTESTPAD_40-ROUND  [TESTPAD_40-ROUND]  46.74,47.88 0 bottom
2.5V  TESTPADTESTPAD_40-ROUND  [TESTPAD_40-ROUND]  23.24,36.32 0 bottom
3.0VA  TESTPADTESTPAD_40-ROUND  [TESTPAD_40-ROUND]  20.07,49.78 0 bottom
3.3V  TESTPADTESTPAD_40-ROUND  [TESTPAD_40-ROUND]  50.04,47.88 0 bottom
5V_E  Open  [SJ_1_SMALLER]  69.98,52.96 270 bottom
5V_E_SATA  [SJ_1_SMALLER]  7.49,57.53 0 bottom
5V_SATA_PWR  CON2DW02R  [DW02R]  4.44,54.99 270 top
5VEXT  TESTPADTESTPAD_40-ROUND  [TESTPAD_40-ROUND]  72.26,56.9 0 bottom
+5V  TESTPADTESTPAD_40-ROUND  [TESTPAD_40-ROUND]  13.33,35.56 0 bottom
BAT  TESTPADTESTPAD_40-ROUND  [TESTPAD_40-ROUND]  70.61,42.16 0 bottom
C1  220nF  [C0402_TI]  64.52,22.73 90 top
C2  220nF  [C0402_TI]  57.15,22.73 90 top
C3  220nF  [C0402_TI]  44.73,24.05 180 bottom
C4  220nF  [C0402_TI]  44.63,25.04 180 bottom
C5  220nF  [C0402_TI]  44.73,27.79 180 bottom
C6  220nF  [C0402_TI]  44.73,28.68 180 bottom
C7  220nF  [C0402_TI]  46.04,25.91 270 bottom
C8  220nF  [C0402_TI]  44.73,31.57 180 bottom
C9  220nF  [C0402_TI]  46.61,30.67 90 bottom
C10  220nF  [C0402_TI]  59.25,38.1 0 bottom
C11  220nF  [C0402_TI]  44.32,33.1 90 bottom
C12  220nF  [C0402_TI]  45.26,33.1 90 bottom
C13  220nF  [C0402_TI]  56.26,22.73 90 top
C14  220nF  [C0402_TI]  65.41,22.73 90 top
C15  22uF/6.3V  [C0603_DWS]  47.12,41.02 180 bottom
C16  220nF  [C0402_TI]  44.73,29.57 0 bottom
C17  220nF  [C0402_TI]  44.73,30.56 0 bottom
C18  220nF  [C0402_TI]  39.55,29.29 270 bottom
C19  220nF  [C0402_TI]  53.78,36.83 180 bottom
C20  220nF  [C0402_TI]  63.5,34.04 0 top
C21  220nF  [C0402_TI]  58.8,31.62 90 bottom
C22  220nF  [C0402_TI]  61.09,29.46 90 bottom
C23  220nF  [C0402_TI]  63.5,25.65 0 top
C24  220nF  [C0402_TI]  61.09,33.53 90 bottom
C25  220nF  [C0402_TI]  51.44,26.16 270 top
C26  220nF  [C0402_TI]  63.5,31.75 0 top
C27  220nF  [C0402_TI]  63.5,26.8 180 top
C28  220nF  [C0402_TI]  38.48,23.5 90 bottom
C29  220nF  [C0402_TI]  37.8,27.94 0 bottom
C30  220nF  [C0402_TI]  37.46,31.5 180 bottom
C31  220nF  [C0402_TI]  39.55,27.36 270 bottom
C32  220nF  [C0402_TI]  35.13,24.87 180 bottom
C33  220nF  [C0402_TI]  44.63,26.9 0 bottom
C34  220nF  [C0402_TI]  42.06,27.94 180 bottom
C35  220nF  [C0402_TI]  42.44,33.1 270 bottom
C36  220nF  [C0402_TI]  41.5,33.1 270 bottom
C37  220nF  [C0402_TI]  43.38,33.1 270 bottom
C38  220nF  [C0402_TI]  61.09,31.5 270 bottom
C39  220nF  [C0402_TI]  63.5,36.32 0 top
C40  220nF  [C0402_TI]  61.09,35.5 270 bottom
C41  220nF  [C0402_TI]  63.5,35.18 180 top
C42  220nF  [C0402_TI]  63.5,27.94 0 top
C43  220nF  [C0402_TI]  63.5,32.89 180 top
C44  220nF  [C0402_TI]  61.47,26.92 90 bottom
C45  220nF  [C0402_TI]  59.56,38.73 180 top
C46  220nF  [C0402_TI]  63.5,30.61 180 top
C47  1nF  [C0402_TI]  26.8,48.51 180 bottom
C48  220nF  [C0402_TI]  41.25,23.5 90 bottom
C49  220nF  [C0402_TI]  54.74,50.04 0 bottom
C50  220nF  [C0402_TI]  40.28,23.5 90 bottom
C51  220nF  [C0402_TI]  37.52,23.5 90 bottom
C52  220nF  [C0402_TI]  39.38,23.5 90 bottom
C53  220nF  [C0402_TI]  39.55,25.43 270 bottom
C54  100nF  [C0402_TI]  56.26,19.68 270 top
C55  22uF/6.3V  [C0603_DWS]  54.99,19.05 270 top
C56  220nF  [C0402_TI]  40.56,33.1 90 bottom
C57  220nF  [C0402_TI]  37.72,33.1 90 bottom
C58  220nF  [C0402_TI]  39.62,33.15 90 bottom
C59  NA  [C0603_DWS]  53.47,22.35 90 top
C60  100nF  [C0402_TI]  63.44,13.08 270 bottom
C61  100nF  [C0402_TI]  55.5,12.06 270 bottom
C62  22uF/6.3V  [C0603_DWS]  64.64,13.46 270 bottom
C63  33pF  [C0603_DWS]  52.2,16 180 bottom
C64  33pF  [C0603_DWS]  52.2,8.38 180 bottom
C65  220nF  [C0402_TI]  35.13,31.32 0 bottom
C66  220nF  [C0402_TI]  39.93,35.08 0 bottom
C67  220nF  [C0402_TI]  35.13,27.69 180 bottom
C68  220nF  [C0402_TI]  39.37,16.13 90 bottom
C69  220nF  [C0402_TI]  39.55,31.22 90 bottom
C70  220nF  [C0402_TI]  44.73,22.99 0 bottom
C71  220nF  [C0402_TI]  43.18,23.5 90 bottom
C72  220nF  [C0402_TI]  42.21,23.5 90 bottom
C73  220nF  [C0402_TI]  36.55,23.5 90 bottom
C74  100nF  [C0402_TI]  60.07,9.91 90 bottom
C75  100nF  [C0402_TI]  55.5,10.03 270 bottom
C76  22uF/6.3V  [C0603_DWS]  56.77,10.54 270 bottom
C77  220nF  [C0402_TI]  35.13,23.95 0 bottom
C78  220nF  [C0402_TI]  35.13,22.99 0 bottom
C79  1uF  [C0603_DWS]  37.66,14.54 180 top
C80  100nF  [C0402_TI]  37.02,15.75 180 top
C81  10pF  [C0603_DWS]  53.15,24.89 270 bottom
C82  100nF  [C0402_TI]  18.67,39.75 180 top
C83  100nF  [C0402_TI]  20.96,39.75 0 top
C84  100nF  [C0402_TI]  21.59,16.64 0 top
C85  10pF  [C0603_DWS]  53.15,21.59 90 bottom
C86  100nF  [C0402_TI]  57.59,14.86 270 bottom
C87  100nF  [C0402_TI]  56.64,18.41 270 bottom
C88  100nF  [C0402_TI]  61.72,18.41 270 bottom
C89  100nF  [C0402_TI]  60.07,12.7 90 bottom
C90  33pF  [C0603_DWS]  26.42,27.56 90 bottom
C91  33pF  [C0603_DWS]  26.42,30.86 270 bottom
C92  22uF/6.3V  [C0603_DWS]  52.58,19.94 180 top
C93  100nF  [C0402_TI]  44.63,25.93 0 bottom
C94  22uF/6.3V  [C0603_DWS]  31.62,41.53 180 top
C95  220nF  [C0402_TI]  35.28,30.43 180 bottom
C96  22uF/6.3V  [C0603_DWS]  16.38,7.75 0 bottom
C97  22uF/6.3V  [C0603_DWS]  26.42,34.16 90 bottom
C98  22uF/6.3V  [C0603_DWS]  16.38,9.27 0 bottom
C99  1uF  [C0603_DWS]  26.67,44.7 180 bottom
C100  220nF  [C0402_TI]  26.16,42.42 180 bottom
C101  10uF/6.3V  [C0603_DWS]  26.67,41.27 0 top
C102  10uF/6.3V  [C0603_DWS]  26.67,44.45 0 top
C103  220nF  [C0402_TI]  26.16,43.31 180 bottom
C104  220nF  [C0402_TI]  22.35,22.73 90 bottom
C105  220nF  [C0402_TI]  21.46,22.73 90 bottom
C106  220nF  [C0402_TI]  32.51,40.32 180 top
C107  220nF  [C0402_TI]  35.05,40.32 0 top
C108  10uF/6.3V  [C0603_DWS]  35.56,39.5 270 bottom
C109  100nF  [C0402_TI]  25.78,13.21 270 bottom
C110  100nF  [C0402_TI]  18.92,15.75 270 bottom
C111  100nF  [C0402_TI]  18.92,11.56 270 bottom
C112  22uF/6.3V  [C0603_DWS]  25.15,15.75 0 bottom
C113  1nF  [C0402_TI]  56.52,58.42 270 bottom
C114  1nF  [C0402_TI]  56.52,54.61 90 bottom
C115  1nF  [C0402_TI]  57.78,58.42 270 bottom
C116  1nF  [C0402_TI]  57.78,54.61 90 bottom
C117  10uF/6.3V  [C0603_DWS]  78.36,20.32 0 bottom
C118  22uF/6.3V  [C0603_DWS]  78.36,22.22 180 bottom
C119  22uF/6.3V  [C0603_DWS]  20.19,22.35 90 bottom
C120  100nF  [C0402_TI]  77.47,25.53 270 bottom
C121  220nF  [C0402_TI]  35.13,26.8 180 bottom
C122  22uF/6.3V  [C0603_DWS]  50.67,42.67 90 top
C123  220nF  [C0402_TI]  35.13,25.83 180 bottom
C124  10uF/6.3V  [C0603_DWS]  78.36,28.45 0 bottom
C125  22uF/6.3V  [C0603_DWS]  78.36,30.35 180 bottom
C126  100nF  [C0402_TI]  77.47,33.66 270 bottom
C127  10nF  [C0402_TI]  8.64,40.13 0 bottom
C128  10nF  [C0402_TI]  8.64,41.02 0 bottom
C129  10nF  [C0402_TI]  8.64,43.94 0 bottom
C130  10uF/6.3V  [C0603_DWS]  71.88,39.5 0 bottom
C131  10nF  [C0402_TI]  8.64,44.83 0 bottom
C132  10uF/6.3V  [C0603_DWS]  66.55,38.23 90 bottom
C133  1uF  [C0603_DWS]  72.9,46.23 0 bottom
C134  10uF/6.3V  [C0603_DWS]  75.31,41.66 270 top
C135  10uF/6.3V  [C0603_DWS]  72.9,47.75 180 bottom
C136  10uF/6.3V  [C0603_DWS]  69.98,48.13 90 bottom
C137  220nF  [C0402_TI]  38.66,33.1 90 bottom
C138  10uF/6.3V  [C0603_DWS]  65.02,38.23 90 bottom
C139  22uF/6.3V  [C0603_DWS]  43.81,41.02 0 bottom
C140  22uF/6.3V  [C0603_DWS]  7.49,54.99 90 bottom
C141  NA(22uF/6.3V)  [C0603_DWS]  5.97,54.99 90 bottom
C142  10uF/6.3V  [C0603_DWS]  53.09,50.55 90 top
C143  1nF  [C0402_TI]  54.36,50.93 90 top
C144  10uF/6.3V  [C0603_DWS]  66.93,51.69 0 top
C145  1uF  [C0603_DWS]  59.18,41.53 90 bottom
C146  10uF/6.3V  [C0603_DWS]  53.47,44.45 90 top
C147  1nF  [C0402_TI]  52.2,44.45 90 top
C148  100nF  [C0402_TI]  7.81,51.69 90 bottom
C149  10uF/6.3V  [C0603_DWS]  60.2,49.02 90 bottom
C150  1uF  [C0603_DWS]  61.98,38.23 90 bottom
C151  22uF/6.3V  [C0603_DWS]  24,34.16 90 bottom
C152  220nF  [C0402_TI]  35.13,29.54 180 bottom
C153  10uF/6.3V  [C0603_DWS]  63.5,38.23 270 bottom
C154  1uF  [C0603_DWS]  60.07,40.51 0 top
C155  22uF/6.3V  [C0603_DWS]  49.15,42.67 90 top
C156  220nF  [C0402_TI]  35.13,28.58 180 bottom
C157  10uF/6.3V  [C0603_DWS]  60.71,41.53 90 bottom
C158  10uF/6.3V  [C0603_DWS]  58.67,49.02 90 bottom
C159  10uF/6.3V  [C0603_DWS]  71.88,42.55 0 top
C160  10uF/6.3V  [C0603_DWS]  71.88,41.02 0 top
C161  1nF  [C0402_TI]  69.98,48.64 270 top
C162  220nF  [C0402_TI]  34.9,33.1 270 bottom
C163  10uF/6.3V  [C0603_DWS]  56.52,49.02 90 bottom
C164  22uF/6.3V  [C0603_DWS]  22.48,34.16 90 bottom
C165  22uF/6.3V  [C0603_DWS]  19.43,50.55 0 top
C166  22uF/6.3V  [C0603_DWS]  19.68,43.69 180 top
C167  100nF  [C0402_TI]  20.07,44.96 180 top
C168  220nF  [C0402_TI]  36.78,33.1 270 bottom
C169  22uF/6.3V  [C0603_DWS]  35.18,44.58 0 top
C170  220nF  [C0402_TI]  35.84,33.1 270 bottom
C171  470nF  [C0603_DWS]  35.18,43.05 0 top
C172  22uF/6.3V  [C0603_DWS]  31.62,43.05 180 top
C173  470nF  [C0603_DWS]  35.18,41.53 0 top
C174  470uF/10V/105C  [E2,5-6,3]  70.36,56.26 90 top
C175  22pF  [C0603_DWS]  46.74,45.72 270 bottom
C176  22uF/6.3V  [C0603_DWS]  54.36,41.4 90 bottom
C177  22uF/6.3V  [C0603_DWS]  51.82,45.72 270 bottom
C178  22uF/6.3V  [C0603_DWS]  53.34,45.72 270 bottom
C179  22uF/6.3V  [C0603_DWS]  77.72,42.55 180 bottom
C180  22uF/6.3V  [C0603_DWS]  80.14,43.43 270 bottom
C181  22uF/6.3V  [C0603_DWS]  77.72,48.39 180 bottom
C182  22uF/6.3V  [C0603_DWS]  31.75,52.96 90 bottom
C183  22pF  [C0603_DWS]  25.78,57.78 270 top
C184  22uF/6.3V  [C0603_DWS]  27.3,57.78 270 bottom
C185  22uF/6.3V  [C0603_DWS]  25.78,57.78 270 bottom
C186  22uF/6.3V  [C0603_DWS]  77.72,41.02 180 bottom
CHGLED  LED/YELLOW/0603  [LED-0603]  77.72,42.67 180 top
D1  1N5819(S4SOD-123)  [SOD-123]  53.09,17.91 180 bottom
D2  1N5819(S4SOD-123)  [SOD-123]  68.83,4.06 0 bottom
D3  1N5822/SS34/SMA  [MLL-41]  72.26,52.96 90 bottom
D4  SMBJ6.0A  [DO214AA]  77.6,52.32 90 bottom
D5  1N5822/SS34/SMA  [MELF-MLL41]  80.39,38.73 180 bottom
FET1  IRLML6402  [SOT23]  10.29,57.28 0 bottom
FET2  IRLML6402  [SOT23]  71.5,51.18 180 top
FUSE1  FSMD035  [1206]  11.68,33.02 270 bottom
GND  TESTPADTESTPAD_40-ROUND  [TESTPAD_40-ROUND]  17.27,58.67 0 bottom
GND_PIN  TESTPAD3  [TEST_PAD40/70/SQUARE]  26.16,1.27 0 top
GPIO-1  ML40YA-V36P-2X20-LF  [YA-V36P-2X20-LF]  38.1,50.16 0 top
GPIO-2  ML40YA-V36P-2X20-LF  [YA-V36P-2X20-LF]  38.1,9.52 0 top
GPIO-3  ML40YA-V36P-2X20-LF  [YA-V36P-2X20-LF]  45.72,3.17 0 top
GPIO-4  ML20YA-V36P-2X10-LF  [YA-V36P-2X10-LF]  14.86,53.09 90 top
HDMI  HDMI-SWM-19  [HDMI-SWM-19]  10.54,25.27 180 top
IPSOUT  TESTPADTESTPAD_40-ROUND  [TESTPAD_40-ROUND]  58.8,45.59 0 bottom
L1  FB0805/600R/2A  [L0805_5MIL_DWS]  53.21,17.14 270 top
L2  FB0805/600R/2A  [L0805_5MIL_DWS]  61.98,14.22 90 bottom
L3  FB0805/600R/2A  [L0805_5MIL_DWS]  58.55,10.67 90 bottom
L4  CL470nH/0805/1.76R/250mA  [L0805_5MIL_DWS]  16.13,5.21 0 bottom
L5  FB0805/600R/2A  [L0805_5MIL_DWS]  21.46,15.75 180 bottom
L6  FB0805/600R/2A  [L0805_5MIL_DWS]  9.4,3.17 270 top
L7  FB0805/600R/2A  [L0805_5MIL_DWS]  78.99,25.02 90 bottom
L8  FB0805/600R/2A  [L0805_5MIL_DWS]  78.99,33.15 90 bottom
L9  FB0805/600R/2A  [L0805_5MIL_DWS]  72.14,30.86 0 bottom
L10  2.2uH/1.5A/DCR<0.1R/CD32  [CD32]  72.39,46.23 0 top
L11  2.2uH/1.5A/DCR<0.1R/CD32  [CD32]  56.77,50.93 0 top
L12  2.2uH/1.5A/DCR<0.1R/CD32  [CD32]  56.26,45.21 0 top
L13  2.2uH/1.5A/DCR<0.1R/CD32  [CD32]  56.13,45.21 180 bottom
L14  2.2uH/1.5A/DCR<0.1R/CD32  [CD32]  81.41,47.37 0 bottom
L15  2.2uH/1.5A/DCR<0.1R/CD32  [CD32]  30.86,57.4 90 bottom
LAN  RJLBC-060TC1_GND_MILLING  [RJLBC-060TC1_MILLING]  76.83,12.06 90 top
LCD_CON  ML40YA-V36P-2X20-LF  [YA-V36P-2X20-LF]  45.72,56.52 0 top
LED1  LED/GREEN/0603  [LED-0603]  28.96,2.16 90 top
LIPO_BAT  CON2DW02R  [DW02R]  81.53,43.43 90 top
NAND_E  Close  [SJ_1_SMALLER_CLOSE_10MILS]  20.19,35.69 270 bottom
PC3/PB1  [SJ_2_SMALL_23_TIED]  10.29,47.24 180 bottom
PWR  SIDE_WTCM-TR(3X4)  [SW_TAKT3X4]  1.27,54.36 270 bottom
PWR_JACK  YDJ-1136  [PWR_JACK_UNI_MILLING]  74.3,56.64 180 top
PWR_LED  LED/RED/0603  [LED-0603]  80.26,58.17 180 top
Q1  4SB25.000F20E15/5x3.2mm/20ppm/20pF  [HCX-4S]  52.7,12.19 90 bottom
Q2  32768Hz/6pF  [MC-306]  58.29,23.24 180 bottom
Q3  4SB24.000F20E15/5x3.2mm/20ppm/20pF  [HCX-4S]  23.88,29.21 270 bottom
R1  2.2k  [R0603_5MIL_DWS]  30.73,2.16 90 top
R2  2k/1%  [R0603_5MIL_DWS]  63.25,22.35 270 top
R3  2k/1%  [R0603_5MIL_DWS]  58.42,22.35 270 top
R4  NA  [R0603_5MIL_DWS]  60.83,23.24 180 top
R5  2k/1%  [R0603_5MIL_DWS]  66.67,22.35 90 top
R6  2k/1%  [R0603_5MIL_DWS]  54.99,22.35 90 top
R7  2k/1%  [R0603_5MIL_DWS]  47.62,38.73 0 bottom
R8  237R/1%  [R0603_5MIL_DWS]  63.5,29.27 180 top
R9  22R  [R0402_TI]  50.93,34.16 180 top
R10  100k/1%  [R0603_5MIL_DWS]  23.88,49.78 180 bottom
R11  22R  [R0402_TI]  50.93,33.27 180 top
R12  NA(Close_0R)  [R0402_TI]  47.62,37.47 0 bottom
R13  NA(Close_0R)  [R0402_TI]  47.62,36.58 0 bottom
R14  330R/1%  [R0603_5MIL_DWS]  43.81,39.5 0 bottom
R15  NA(2.2k)  [R0603_5MIL_DWS]  73.66,12.32 270 bottom
R16  NA(2.2k)  [R0603_5MIL_DWS]  72.14,12.32 90 bottom
R17  10k  [R0603_5MIL_DWS]  23.62,39.75 0 top
R18  10k  [R0603_5MIL_DWS]  22.35,41.27 0 top
R19  2k/1%  [R0603_5MIL_DWS]  60.83,21.21 0 top
R20  10k  [R0603_5MIL_DWS]  19.05,41.27 180 top
R21  47k  [R0603_5MIL_DWS]  51.05,20.7 270 bottom
R22  560R  [R0603_5MIL_DWS]  79.76,16.76 270 bottom
R23  47k  [R0603_5MIL_DWS]  37.66,16.95 0 top
R24  NA  [R0603_5MIL_DWS]  58.8,14.73 270 bottom
R25  560R  [R0603_5MIL_DWS]  79.76,6.1 270 bottom
R26  100k/1%  [R0603_5MIL_DWS]  16.38,12.32 180 bottom
R27  10k  [R0603_5MIL_DWS]  16.38,10.79 180 bottom
R28  200k/1%  [R0603_5MIL_DWS]  26.67,42.8 180 top
R29  10k  [R0603_5MIL_DWS]  11.18,13.34 270 top
R30  2k/1%  [R0603_5MIL_DWS]  14.48,32.13 90 top
R31  2k/1%  [R0603_5MIL_DWS]  12.95,32.13 90 top
R32  47k  [R0603_5MIL_DWS]  11.43,32.13 90 top
R33  4.99k/1%  [R0603_5MIL_DWS]  21.46,13.97 180 bottom
R34  NA(0R)  [R0603_5MIL_DWS]  42.61,40.39 90 top
R35  10k  [R0603_5MIL_DWS]  21.46,9.14 0 bottom
R36  13k/1%  [R0603_5MIL_DWS]  24.51,9.91 270 bottom
R37  10k  [R0603_5MIL_DWS]  24.51,13.21 90 bottom
R38  NA  [R0603_5MIL_DWS]  52.45,56.39 0 bottom
R39  NA  [R0603_5MIL_DWS]  52.45,54.86 0 bottom
R40  10k  [R0603_5MIL_DWS]  81.79,20.32 180 bottom
R41  13k/1%  [R0603_5MIL_DWS]  81.79,26.16 180 bottom
R42  47k  [R0603_5MIL_DWS]  11.18,3.17 90 top
R43  2.2k  [R0603_5MIL_DWS]  43.69,45.72 270 bottom
R44  2.2k  [R0603_5MIL_DWS]  45.21,45.72 270 bottom
R45  2.2k  [R0603_5MIL_DWS]  52.83,49.02 270 bottom
R46  2.2k  [R0603_5MIL_DWS]  51.31,49.02 270 bottom
R47  10k  [R0603_5MIL_DWS]  81.79,28.45 180 bottom
R48  13k/1%  [R0603_5MIL_DWS]  81.79,34.29 180 bottom
R49  10k  [R0603_5MIL_DWS]  68.83,5.97 180 bottom
R50  100R  [R0603_5MIL_DWS]  71.88,39.5 180 top
R51  0.03R/1%  [R1206_5MIL_WS]  72.64,42.93 90 bottom
R52  10k  [R0603_5MIL_DWS]  10.29,54.48 180 bottom
R53  100k/1%  [R0603_5MIL_DWS]  66.55,31.11 90 bottom
R54  10k  [R0603_5MIL_DWS]  10.29,48.89 180 bottom
R55  200k/1%  [R0603_5MIL_DWS]  66.55,34.42 90 bottom
R56  2.2k  [R0603_5MIL_DWS]  77.72,44.2 180 top
R57  191R/1%  [R0603_5MIL_DWS]  26.67,41.02 180 bottom
R58  4.99k/1%  [R0603_5MIL_DWS]  6.6,51.69 270 bottom
R59  200k/1%  [R0603_5MIL_DWS]  60.07,42.04 0 top
R60  2.2k  [R0402_TI]  69.09,48.64 270 top
R61  2.2k  [R0402_TI]  66.93,50.42 180 top
R62  2.2k  [R0402_TI]  67.18,51.44 90 bottom
R63  2.2k  [R0402_TI]  62.99,40.13 180 top
R64  2.2k  [R0402_TI]  68.07,51.44 90 bottom
R65  2.2k  [R0603_5MIL_DWS]  76.96,58.17 0 top
R66  0R(Board_Mounted)  [0603_0R]  68.33,56.26 270 bottom
R67  8.25k/1%  [R0603_5MIL_DWS]  75.31,41.66 270 bottom
R68  4.99k/1%  [R0603_5MIL_DWS]  48.77,45.72 270 bottom
R69  1.1k/1%  [R0603_5MIL_DWS]  75.31,46.86 90 bottom
R70  3.32k/1%  [R0603_5MIL_DWS]  47.88,43.31 0 bottom
R71  4.99k/1%  [R0603_5MIL_DWS]  27.3,57.78 270 top
R72  1.1k/1%  [R0603_5MIL_DWS]  26.92,52.96 90 bottom
RECOVERY  SIDE_WTCM-TR(3X4)  [SW_TAKT3X4]  1.27,37.85 270 bottom
RESET  SIDE_WTCM-TR(3X4)  [SW_TAKT3X4]  1.27,46.1 270 bottom
RM1  RA1206_(4X0603)_4B8_4.7k  [R_MATRIX_4]  64.26,18.29 270 bottom
RM2  RA1206_(4X0603)_4B8_4.7k  [R_MATRIX_4]  62.61,10.29 270 bottom
RM3  RA1206_(4X0603)_4B8_51R  [R_MATRIX_4]  59.18,18.29 90 bottom
RM4  RA1206_(4X0603)_4B8_100K  [R_MATRIX_4]  16.38,2.16 0 bottom
RM5  RA1206_(4X0603)_4B8_10k  [R_MATRIX_4]  50.16,2.16 270 bottom
SATA  SATA-PWA-07  [SATA-PWA-07]  9.78,34.16 90 top
SD/MMC1  MICRO_SD/MMC_CP_NEWTFC-WPAPR-08  [TFC-WPAPR-08]  12.7,7.68 270 bottom
T1  BC846B  [SOT23]  10.29,51.69 90 bottom
U1  MEM4G16D3EABG-125  [FBGA96_MEM]  56.82,31.09 0 top
U2  RTL8201CP  [LQFP48]  60.07,14.22 0 top
U3  AT24C16BN-SH  [SO-08MN]  79.12,12.06 270 bottom
U4  H27UBG8T2BTR  [TSOP48]  21.59,28.19 180 top
U5  NA(RCLAMP0524P)  [SLP2510P8]  13.21,22.35 90 top
U6  NA(RCLAMP0524P)  [SLP2510P8]  13.21,25.4 90 top
U7  A10  [TFBGA441]  39.92,28.29 180 top
U8  NA(RCLAMP0524P)  [SLP2510P8]  13.21,28.32 90 top
U9  SY6280  [SOT23-5]  21.46,11.56 270 bottom
U10  SY6280  [SOT23-5]  81.53,23.24 180 bottom
U11  SY6280  [SOT23-5]  81.53,31.37 180 bottom
U12  AXP209(QFN48)  [QFN48]  65.15,44.96 180 top
U13  SY8008C(AA)C  [SOT23-5]  51.82,41.91 180 bottom
U14  SY7208(SOT23-6)  [SOT23-6]  77.72,45.47 0 bottom
U15  SY8008C(AA)C  [SOT23-5]  29.34,52.32 180 bottom
U16  FIDUCIAL  [FIDUCIAL-1X3]  10.16,54.99 180 top
U17  FIDUCIAL  [FIDUCIAL-1X3]  81.79,12.06 180 top
U18  FIDUCIAL  [FIDUCIAL-1X3]  8.89,37.59 0 bottom
U19  FIDUCIAL  [FIDUCIAL-1X3]  81.53,2.67 0 bottom
U$2  [HAMMOND_1593LBK_A10_LIME]  0,0 0 top
U$5  [LOGO-OPENHARDWARE_8X8]  21.21,44.32 0 bottom
U$6  [OLIMEX1_V]  30.86,6.1 0 bottom
U$8  [OLIMEX1_V]  82.75,14.63 37 top
U$9  [PB]  39.24,51.82 0 bottom
U$10  [ESD_SYMBOL]  34.8,14.6 0 bottom
U$11  [RECYCLE_BIN1/8]  41.53,42.42 0 bottom
U$12  [ROHS]  17.65,21.72 0 bottom
UART0  HN1X3  [HN1X3]  69.85,1.52 0 top
USB_HOST1  USB_A_VERTICAL  [USB_A_VERTICAL_PTH]  87.88,22.61 90 top
USB_HOST2  USB_A_VERTICAL  [USB_A_VERTICAL_PTH]  87.88,32.26 90 top
USB_OTG  USB-OTG  [USB_MINI_9PIN]  4.06,7.63 0 top
VR1  AP1231-2.5V(SOT23-5)  [SOT-23-5]  19.94,47.62 180 top

## Library data of the parts
1.2V_CPU 1.2V_INT 1.5V 2.5V 3.0VA 3.3V 5VEXT +5V BAT D1-D3 FUSE1 GND GND_PIN IPSOUT PWR PWR_JACK RECOVERY RESET U3 = gogo
5V_E 5V_E_SATA NAND_E PC3/PB1 = jumper
5V_SATA_PWR FET1 FET2 LIPO_BAT UART0 = Penko
C1-C186 L1-L9 R1-R65 R67-R72 = rcl
CHGLED LED1 PWR_LED = DOUBLE-SIDE
D4 L10-L15 R66 RM1-RM5 VR1 = OLIMEX_DISCRET
D5 T1 = semicon-smd-ipc
GPIO-1-GPIO-3 LCD_CON U$2 = OLIMEX_CASES
GPIO-4 = con-harting-ml
HDMI LAN SATA SD/MMC1 USB_HOST1 USB_HOST2 USB_OTG = OLIMEX_CONNECTORS
Q1-Q3 = crystal
U1 U2 U4-U15 = OLIMEX_IC
U16-U19 = SparkFunEagle-6-6-07
U$5 U$6 U$8-U$12 = olimex_logo1

## Nets
5VEXT: 5V_E.1 5VEXT.1 C132.2 C174.+ D3.A D4.C FET2.1 PWR_JACK.+ R65.1 U12.32 U12.33
+5V: 5V_E.2 5V_E_SATA.1 +5V.1 C111.1 C117.1 C124.1 D3.K FET1.2 FET2.2 FUSE1.1 GPIO-1.1 GPIO-2.1 GPIO-3.1 LCD_CON.1 R30.2 R31.2 R52.1 U9.5 U10.5 U11.5
+5V_OTG_PWR: C110.1 C138.2 L5.1 R53.1 U12.31 USB_OTG.VBUS
+24V: BAT.1 C133.2 C135.1 C180.2 LIPO_BAT.1 R51.2 U12.38 U12.39 U12.42
BA0: U1.M2 U7.K3
BA1: U1.N8 U7.L4
BA2: U1.M3 U7.K4
CASN: U1.K3 U7.U3
CKE: U1.K9 U7.N3
CLK: R9.1 U1.J7
CLKN: R11.1 U1.K7
CPU-REF: C2.2 C13.2 C59.2 R3.1 R4.2 R6.2 U7.AA8 U7.H3 U7.H4 U7.Y5
DDR3_ODT: R13.1 U1.K1
DDR3_RST: R7.1 R12.1 U1.T2
DDR_VREF: C1.2 C14.2 R2.1 R4.1 R5.2 U1.H1 U1.M8
DQ0: U1.E3 U7.AB4
DQ1: U1.F7 U7.AC7
DQ2: U1.F2 U7.AC4
DQ3: U1.F8 U7.AB8
DQ4: U1.H3 U7.AC8
DQ5: U1.H8 U7.AB5
DQ6: U1.G2 U7.AB7
DQ7: U1.H7 U7.AC3
DQ8: U1.D7 U7.AB2
DQ9: U1.C3 U7.Y1
DQ10: U1.C8 U7.AC2
DQ11: U1.C2 U7.Y2
DQ12: U1.A7 U7.AA1
DQ13: U1.A2 U7.AB3
DQ14: U1.B8 U7.W2
DQ15: U1.A3 U7.AC1
ECOL: U2.1 U7.D13
ECRS: U2.23 U7.E12
EMDC: U2.25 U7.E10
EMDIO: RM1.1.1 U2.26 U7.D11
EPHY-RST#: R24.1 U7.C13
ERXCK: U2.16 U7.D9
ERXD0: U2.21 U7.E6
ERXD1: U2.20 U7.D6
ERXD2: U2.19 U7.E5
ERXD3: U2.18 U7.D5
ERXDV: U2.22 U7.D10
ERXERR: U2.24 U7.E9
ETXCK: U2.7 U7.D12
ETXD0: U2.6 U7.E8
ETXD1: U2.5 U7.D8
ETXD2: U2.4 U7.E7
ETXD3: U2.3 U7.D7
ETXEN: U2.2 U7.E11
EXTEN: U12.20 U14.4 U15.1
FMINL: GPIO-4.19 U7.Y20
FMINR: GPIO-4.17 U7.Y21
GND [PWR]: 5V_SATA_PWR.2 C3.1 C4.1 C5.1 C6.1 C7.1 C8.1 C9.1 C10.1 C11.1 C12.1 C13.1 C14.1 C15.1 C16.1 C17.1 C18.1 C19.1 C20.1 C21.1 C22.1 C23.1 C24.1 C25.1 C26.1 C27.1 C28.1 C29.1 C30.1 C31.1 C32.1 C33.1 C34.1 C35.1 C36.1 C37.1 C38.1 C39.1 C40.1 C41.1 C42.1 C43.1 C44.1 C45.1 C46.1 C48.1 C49.1 C50.1 C51.1 C52.1 C53.1 C54.1 C55.1 C56.1 C57.1 C58.1 C59.1 C60.1 C61.1 C62.1 C63.1 C64.1 C65.1 C66.1 C67.1 C68.1 C69.1 C70.1 C71.1 C72.1 C73.1 C74.2 C75.2 C76.2 C77.1 C78.1 C79.1 C80.1 C81.1 C82.1 C83.1 C84.1 C85.1 C86.1 C87.1 C88.1 C89.1 C90.1 C91.1 C92.1 C93.1 C94.1 C95.1 C96.1 C98.1 C104.1 C105.1 C106.1 C107.1 C108.1 C109.2 C110.2 C111.2 C112.1 C113.1 C114.1 C115.1 C116.1 C117.2 C118.1 C119.1 C120.2 C121.1 C122.1 C123.1 C124.2 C125.1 C126.2 C130.1 C132.1 C134.2 C135.2 C136.2 C137.2 C138.1 C139.1 C140.1 C141.1 C142.2 C143.2 C144.2 C145.1 C146.2 C147.2 C148.2 C149.2 C150.1 C151.1 C152.1 C153.2 C154.1 C155.1 C156.1 C157.1 C158.2 C159.2 C160.2 C161.1 C162.2 C163.2 C164.1 C165.2 C166.2 C167.2 C168.2 C169.1 C170.2 C171.1 C172.1 C173.1 C174.- C176.2 C177.2 C178.2 C179.2 C180.1 C181.1 C182.2 C184.2 C185.2 C186.2 D4.A GND.1 GND_PIN.P$1 GPIO-1.2 GPIO-2.2 GPIO-3.2 GPIO-3.4 GPIO-4.2 HDMI.2 HDMI.5 HDMI.8 HDMI.11 HDMI.17 HDMI.SH1 HDMI.SH2 HDMI.SH3 HDMI.SH4 L6.1 L9.1 LAN.GND1 LAN.GND2 LCD_CON.2 LCD_CON.4 LED1.C LIPO_BAT.2 PWR.2_1 PWR_JACK.- PWR_JACK.-- PWR_LED.C R5.1 R6.1 R8.1 R14.1 R19.1 R25.2 R29.2 R32.2 R34.2 R35.1 R36.1 R37.1 R40.1 R41.1 R47.1 R48.1 R50.1 R55.2 R57.1 R58.1 R59.1 R61.1 R63.2 R66.1 R69.2 R70.2 R72.2 RECOVERY.1_1 RM1.4.2 RM2.2.1 RM2.3.1 RM2.4.1 SATA.1 SATA.4 SATA.7 SD/MMC1.6 T1.2 U1.A9 U1.B1 U1.B3 U1.B9 U1.D1 U1.D8 U1.E1 U1.E2 U1.E8 U1.F9 U1.G1 U1.G8 U1.G9 U1.J2 U1.J8 U1.M1 U1.M9 U1.P1 U1.P9 U1.T1 U1.T9 U2.11 U2.17 U2.29 U2.35 U2.40 U2.43 U2.45 U3.1 U3.2 U3.3 U3.4 U3.7 U4.13 U4.36 U5.3 U5.8 U6.3 U6.8 U7.AA18 U7.G3 U7.G4 U7.H16 U7.J5 U7.J11 U7.K5 U7.K11 U7.K12 U7.K13 U7.K14 U7.L10 U7.L11 U7.L12 U7.L13 U7.L14 U7.M9 U7.M10 U7.M11 U7.M12 U7.M13 U7.M14 U7.N5 U7.N10 U7.N11 U7.N12 U7.N13 U7.N14 U7.P5 U7.P10 U7.P11 U7.P12 U7.P13 U7.P14 U7.P15 U7.R11 U7.R12 U7.R13 U7.T9 U7.T11 U7.T12 U7.U5 U7.V5 U7.V19 U7.W9 U7.W10 U7.W11 U7.W18 U7.Y7 U7.Y8 U7.Y18 U8.3 U8.8 U9.2 U10.2 U11.2 U12.9 U12.16 U12.22 U12.46 U12.N1 U12.N2 U12.N3 U12.N4 U12.N5 U12.N6 U12.N7 U12.N8 U12.N9 U12.N10 U12.N11 U12.N12 U12.N13 U12.N14 U12.N15 U12.N16 U12.N17 U12.VSS U13.2 U14.2 U15.2 UART0.3 USB_HOST1.4 USB_HOST2.4 USB_OTG.GND VR1.2
GNDA: C47.2 C97.1 C99.1 C100.1 C101.1 C102.1 C103.1 GPIO-1.4 R28.2 R66.2 U7.U19
GPIO1: R53.2 R55.1 U12.18
GPIO2: GPIO-4.12 U12.5
GPIO3: GPIO-4.14 U12.3
HCEC: HDMI.13 U7.P23 U8.1 U8.10
HDMI_5V_SOURCE: FUSE1.2 HDMI.18
HHPD: HDMI.19 R32.1 U7.P22 U8.5 U8.6
HPCOM: GPIO-1.16 U7.AA19 U7.AA20
HPOUTL: GPIO-1.14 U7.Y19
HPOUTR: GPIO-1.18 U7.W19
HSCL: HDMI.15 R30.1 U7.R23 U8.2 U8.9
HSDA: HDMI.16 R31.1 U7.R22 U8.4 U8.7
HTX0N: HDMI.9 U6.2 U6.9 U7.V22
HTX0P: HDMI.7 U6.1 U6.10 U7.V23
HTX1N: HDMI.6 U5.5 U5.6 U7.U22
HTX1P: HDMI.4 U5.4 U5.7 U7.U23
HTX2N: HDMI.3 U5.2 U5.9 U7.T22
HTX2P: HDMI.1 U5.1 U5.10 U7.T23
HTXCN: HDMI.12 U6.5 U6.6 U7.W22
HTXCP: HDMI.10 U6.4 U6.7 U7.W23
IPSOUT: C130.2 C136.1 C144.1 C149.1 C157.2 C160.1 C176.1 C181.2 C182.1 IPSOUT.1 L14.1 R56.1 RESET.1_1 U12.7 U12.13 U12.14 U12.21 U12.34 U12.35 U12.40 U12.44 U13.4 U14.5 U15.4
LCD_CLK: LCD_CON.31 U7.Y9
LCD_D0: LCD_CON.21 U7.AB15
LCD_D1: LCD_CON.22 U7.AC15
LCD_D2: LCD_CON.23 U7.AB14
LCD_D3: LCD_CON.24 U7.AC14
LCD_D4: LCD_CON.25 U7.AB13
LCD_D5: LCD_CON.26 U7.AC13
LCD_D6: LCD_CON.27 U7.AB12
LCD_D7: LCD_CON.28 U7.AC12
LCD_D8: LCD_CON.13 U7.AB11
LCD_D9: LCD_CON.14 U7.AC11
LCD_D10: LCD_CON.15 U7.Y15
LCD_D11: LCD_CON.16 U7.AA15
LCD_D12: LCD_CON.17 U7.Y14
LCD_D13: LCD_CON.18 U7.AA14
LCD_D14: LCD_CON.19 U7.Y13
LCD_D15: LCD_CON.20 U7.AA13
LCD_D16: LCD_CON.5 U7.Y12
LCD_D17: LCD_CON.6 U7.AA12
LCD_D18: LCD_CON.7 U7.Y11
LCD_D19: LCD_CON.8 U7.AA11
LCD_D20: LCD_CON.9 U7.Y10
LCD_D21: LCD_CON.10 U7.AA10
LCD_D22: LCD_CON.11 U7.AB10
LCD_D23: LCD_CON.12 U7.AC10
LCD_DE: LCD_CON.32 U7.AA9
LCD_HSYNC: LCD_CON.29 U7.AB9
LCD_PWR: LCD_CON.35 U7.C4
LCD_VSYNC: LCD_CON.30 U7.AC9
LDO3_2.8V [PWR]: C77.2 C159.1 GPIO-2.4 U7.F19 U12.41
LDO4_2.8V [PWR]: C78.2 C163.1 U7.E18 U12.11
LINEINL: GPIO-4.15 U7.AB20
LINEINR: GPIO-4.13 U7.AB21
LRADC0: C47.1 GPIO-1.6 R10.2 U7.AB23
LRADC1: GPIO-1.8 U7.AB22
MIC1OUTN: GPIO-4.8 U7.AC23
MIC1OUTP: GPIO-4.6 U7.AC22
MICIN1: GPIO-1.10 U7.AC20
MICIN2: GPIO-4.10 U7.AC21
N$1: C107.2 C108.2 U7.AC19
N$2: R14.2 U7.AA7
N$3: R8.2 U1.L8
N$4: CHGLED.A R56.2
N$5: PC3/PB1.2 R54.2
N$6: R19.2 U2.28
N$7: D2.C UART0.2
N$8: L13.1 U13.3
N$9: C145.2 U12.19
N$10: D1.C R21.2
N$11: CHGLED.C U12.36
N$12: R63.1 U12.27
N$13: RM1.4.1 U2.15
N$14: C81.2 Q2.1 U7.F1
N$17: C148.1 R54.1 R58.2 T1.1
N$18: FET1.1 R52.2 T1.3
N$19: C175.2 R68.2 R70.1 U13.5
N$21: C54.2 C55.2 L1.1 U2.36
N$23: C179.1 C186.1 D5.1 FET2.3 R67.2
N$24: 5V_E_SATA.2 5V_SATA_PWR.1 C140.2 C141.2 FET1.3
N$32: C86.2 R24.2 RM1.3.1 U2.42
N$33: C88.2 RM3.1.1 RM3.2.1
N$38: PWR.1_1 R60.1
N$39: LAN.1 RM3.4.2 U2.34
N$40: LAN.2 RM3.3.2 U2.33
N$41: LAN.7 RM3.2.2 U2.31
N$42: C171.2 U7.AA16
N$45: LAN.8 RM3.1.2 U2.30
N$47: C87.2 RM3.3.1 RM3.4.1
N$49: RM2.2.2 U2.10
N$51: RM2.3.2 U2.12
N$53: LAN.KG R22.1
N$54: LAN.AY RM2.4.2 U2.13
N$55: C74.1 L3.1 U2.8
N$56: C75.1 C76.1 C89.2 L3.2 LAN.3 U2.32
N$57: LAN.KY R25.1
N$58: R29.1 SD/MMC1.10 SD/MMC1.11 SD/MMC1.12 SD/MMC1.13
N$64: L15.1 U15.3
N$66: C183.2 R71.2 R72.1 U15.5
N$67 [PWR]: C60.2 C61.2 C62.2 L2.1 U2.14 U2.48
N$68: R22.2 RM2.1.2 U2.9
N$99: R36.2 U9.3
N$100: C112.2 L5.2 R33.2 U9.1
N$101: R41.2 U10.3
N$106: C127.2 SATA.2
N$111: C120.1 L7.2 USB_HOST1.1
N$112: C128.2 SATA.3
N$113: C129.2 SATA.5
N$114: C131.2 SATA.6
N$116: C85.2 Q2.4 U7.F2
N$119: R57.2 U7.V21
N$120: R59.2 U12.23
N$122: C102.2 C103.2 U7.W21
N$123: D5.2 L14.2 U14.1
N$124: C82.2 R20.2 U4.19
N$125: R50.2 U12.37
N$126: R67.1 R69.1 U14.3
N$127: L10.1 U12.45
N$128: C133.1 C134.1 L10.2 R51.1 U12.43
N$129: PWR_LED.A R65.2
N$130: L11.1 U12.8
N$131: L12.1 U12.15
N$132: C154.2 U12.24
N$133: C99.2 U7.W20
N$137: R48.2 U11.3
N$139: C161.2 R60.2 U12.47
N$140: R61.2 RESET.2_1 U12.4
N$176: C100.2 C101.2 R28.1 U7.V20
N$190: R34.1 U7.T10
N$192: C118.2 L7.1 U10.1
N$193: L9.2 USB_HOST1.P$3 USB_HOST1.P$4 USB_HOST2.P$3 USB_HOST2.P$4
N$194: C126.1 L8.2 USB_HOST2.1
N$195: C125.2 L8.1 U11.1
N$223: C173.2 U7.Y16
N$229: LCD_CON.33 R38.1
N$230: LCD_CON.34 R39.1
N$231: LED1.A R1.2
N$232: NAND_E.1 R18.2 U4.9
N$266: L6.2 USB_OTG.GND1 USB_OTG.GND2 USB_OTG.GND3 USB_OTG.GND4
NALE: U4.17 U7.M22
NCE0: NAND_E.2 U7.K23
NCLE: U4.16 U7.L23
NDQ0: U4.29 U7.H23
NDQ1: U4.30 U7.H22
NDQ2: U4.31 U7.G23
NDQ3: U4.32 U7.G22
NDQ4: U4.41 U7.H21
NDQ5: U4.42 U7.H20
NDQ6: U4.43 U7.G21
NDQ7: U4.44 U7.G20
NMI_N: GPIO-4.4 R21.1 U7.F5 U12.48
NRB0: R17.2 U4.7 U7.J23
NRE: U4.8 U7.K22
NWE: U4.18 U7.M23
ODT0: R13.2 U7.AA5
PB2/PWM0: LCD_CON.36 U7.A14
PB3: GPIO-3.6 R38.2 U7.B14
PB4: GPIO-3.8 R39.2 U7.A13
PB5: GPIO-3.10 U7.B13
PB6: GPIO-3.12 U7.A12
PB7: GPIO-3.14 U7.B12
PB8/SATA-PWR-EN: GPIO-3.16 PC3/PB1.1 U7.A11
PB10: GPIO-3.18 U7.C11
PB11: GPIO-3.20 U7.C10
PB12: GPIO-3.22 U7.C9
PB13: GPIO-3.24 U7.B11
PB14: GPIO-3.26 RM5.1.1 U7.A10
PB15: GPIO-3.28 RM5.2.1 U7.B10
PB16: GPIO-3.30 U7.A9
PB17: GPIO-3.32 RM5.4.1 U7.B9
PB18: GPIO-1.36 R15.2 R46.1 U3.6 U7.A8
PB19: GPIO-1.34 R16.1 R45.1 U3.5 U7.B8
PB20: GPIO-1.32 R44.1 U7.C8
PB21: GPIO-1.30 R43.1 U7.C7
PC3/SATA-PWR-EN: GPIO-1.29 PC3/PB1.3 U7.L22
PC7: GPIO-4.16 U7.J22
PC16: GPIO-4.18 U7.M21
PC17: GPIO-4.20 U7.F23
PC18: GPIO-1.31 U7.F22
PC19: GPIO-1.33 U7.L21
PC20: GPIO-1.35 U7.K21
PC21: GPIO-1.37 U7.J21
PC22: GPIO-1.39 U7.J20
PC23: GPIO-1.40 U7.G19
PC24: GPIO-1.38 U7.F21
PE0: GPIO-2.6 U7.E23
PE1 [PWR]: GPIO-2.8 U7.E22
PE2: GPIO-2.10 U7.D23
PE3 [PWR]: GPIO-2.12 U7.D22
PE4: GPIO-2.14 U7.C23
PE5: GPIO-2.16 U7.C22
PE6: GPIO-2.18 U7.B23
PE7: GPIO-2.20 U7.B22
PE8: GPIO-2.22 U7.A23
PE9: GPIO-2.24 U7.A22
PE10: GPIO-2.26 U7.B21
PE11: GPIO-2.28 U7.A21
PG0: GPIO-1.5 U7.F20
PG1: GPIO-1.7 U7.E21
PG2: GPIO-1.9 U7.E20
PG3: GPIO-1.11 U7.D21
PG4: GPIO-1.13 U7.D20
PG5: GPIO-1.15 U7.C21
PG6: GPIO-1.17 U7.E19
PG7: GPIO-1.19 U7.C20
PG8: GPIO-1.21 U7.D19
PG9: GPIO-1.23 U7.C19
PG10: GPIO-1.25 U7.D18
PG11: GPIO-1.27 U7.C18
PH0: GPIO-3.7 U7.A6
PH2/LED: R1.1 U7.C6
PH7: GPIO-3.9 U7.B4
PH9: GPIO-3.11 U7.D4
PH10: GPIO-3.13 U7.A3
PH11: GPIO-3.15 U7.B3
PH12: GPIO-3.17 U7.C3
PH13 [PWR]: GPIO-3.19 U7.A2
PH14: GPIO-3.21 U7.B2
PH15 [PWR]: GPIO-3.23 U7.A1
PH16: GPIO-3.25 U7.B1
PH17: GPIO-3.27 U7.C1
PH18: GPIO-3.29 U7.C2
PH19: GPIO-3.31 U7.D1
PH20: GPIO-3.33 U7.D2
PH21: GPIO-3.35 U7.D3
PH22: GPIO-3.37 U7.E1
PH23: GPIO-3.39 U7.E2
PH24: GPIO-3.34 U7.E3
PH25: GPIO-3.36 U7.E4
PH26: GPIO-3.38 U7.F3
PH27: GPIO-3.40 U7.F4
PI0: GPIO-2.9 U7.A20
PI1: GPIO-2.11 U7.B20
PI2: GPIO-2.13 U7.A19
PI3: GPIO-2.15 U7.B19
PI4: GPIO-2.17 U7.A18
PI5: GPIO-2.19 U7.B18
PI6: GPIO-2.21 U7.A17
PI7: GPIO-2.23 U7.B17
PI8: GPIO-2.25 U7.A16
PI9: GPIO-2.27 U7.B16
PI10: GPIO-2.29 U7.C17
PI11: GPIO-2.31 U7.D17
PI12: GPIO-2.33 U7.C16
PI13: GPIO-2.35 U7.D16
PI14: GPIO-2.37 U7.C15
PI15: GPIO-2.39 U7.D15
PI16: GPIO-2.40 U7.E17
PI17: GPIO-2.38 U7.E16
PI18: GPIO-2.36 U7.E15
PI19: GPIO-2.34 U7.D14
PI20: GPIO-2.32 U7.E14
PI21: GPIO-2.30 U7.E13
RASN: U1.J3 U7.T4
RESET_N: C79.2 C80.2 GPIO-3.5 R23.1 U7.C14 U12.25
SA0: U1.N3 U7.W4
SA1: U1.P7 U7.R4
SA2: U1.P3 U7.U4
SA3: U1.N2 U7.M4
SA4: U1.P8 U7.Y4
SA5: U1.P2 U7.N4
SA6: U1.R8 U7.V4
SA7: U1.R2 U7.M3
SA8: U1.T8 U7.AA3
SA9: U1.R3 U7.P4
SA10: U1.L7 U7.L3
SA11: U1.R7 U7.W3
SA12: U1.N7 U7.P3
SA13: U1.T3 U7.Y3
SA14: U1.T7 U7.R3
SA15: U1.M7 U7.AA4
SATA-RXM: C129.1 U7.U20
SATA-RXP: C131.1 U7.U21
SATA-TXM: C128.1 U7.T21
SATA-TXP: C127.1 U7.T20
SCK: R9.2 U7.V1
SCK#: R11.2 U7.V2
SCS0: U1.L2 U7.V3
SD0-CLK: SD/MMC1.5 U7.L20
SD0-CMD: R27.1 SD/MMC1.3 U7.L19
SD0-D0: RM4.2.2 SD/MMC1.7 U7.M19
SD0-D1: RM4.3.2 SD/MMC1.8 U7.M20
SD0-D2: RM4.1.2 SD/MMC1.1 U7.K19
SD0-D3: R26.1 SD/MMC1.2 U7.K20
SD0-DET#: RM4.4.2 SD/MMC1.9 U7.B6
SD_VCC: C96.2 C98.2 L4.2 SD/MMC1.4
SDQM0: U1.E7 U7.AC6
SDQM1: U1.D3 U7.W1
SDQS0: U1.F3 U7.AB6
SDQS0_N: U1.G3 U7.AC5
SDQS1: U1.C7 U7.AB1
SDQS1_N: U1.B7 U7.AA2
SRST: R12.2 U7.AA6
TPX1: C113.2 LCD_CON.37 U7.Y22
TPX2: C114.2 LCD_CON.38 U7.AA22
TPY1: C115.2 LCD_CON.39 U7.Y23
TPY2: C116.2 LCD_CON.40 U7.AA23
TVIN0: GPIO-4.5 U7.AC18
TVIN1: GPIO-4.7 U7.AB18
TVIN2: GPIO-4.9 U7.AA17
TVIN3: GPIO-4.11 U7.Y17
TVOUT3: GPIO-4.3 U7.AB17
TWI0-SCK: GPIO-2.5 R62.1 U7.A15 U12.2
TWI0-SDA: GPIO-2.7 R64.1 U7.B15 U12.1
UART0-RX: D2.A GPIO-1.26 R49.1 U7.B7
UART0-TX: GPIO-1.28 U7.A7 UART0.1
UBOOT_SEL: RECOVERY.2_1 U7.W8
UDM0: U7.N20 USB_OTG.D-
UDM1: U7.P20 USB_HOST1.2
UDM2: U7.R20 USB_HOST2.2
UDP0: U7.N21 USB_OTG.D+
UDP1: U7.P21 USB_HOST1.3
UDP2: U7.R21 USB_HOST2.3
USB0-DRV: R35.2 U7.C12 U9.4 U12.6
USB0-IDDET: R42.2 U7.B5 USB_OTG.ID
USB0-VBUSDET: C109.1 R33.1 R37.2 U7.C5
USB1-DRV [PWR]: R40.2 U7.A4 U10.4
USB2-DRV [PWR]: R47.2 U7.A5 U11.4
V+: 1.5V.1 C1.1 C2.1 C3.2 C4.2 C5.2 C6.2 C7.2 C8.2 C9.2 C10.2 C11.2 C12.2 C19.2 C20.2 C21.2 C22.2 C23.2 C24.2 C25.2 C26.2 C27.2 C38.2 C39.2 C40.2 C41.2 C42.2 C43.2 C44.2 C45.2 C46.2 C175.1 C177.1 C178.1 L13.2 R2.2 R3.2 R7.2 R68.1 U1.A1 U1.A8 U1.B2 U1.C1 U1.C9 U1.D2 U1.D9 U1.E9 U1.F1 U1.G7 U1.H2 U1.H9 U1.K2 U1.K8 U1.N1 U1.N9 U1.R1 U1.R9 U7.G5 U7.H5 U7.L5 U7.M5 U7.R5 U7.T5 U7.W5 U7.W6 U7.W7 U7.Y6
VCC [PWR]: 3.3V.1 C56.2 C57.2 C58.2 C65.2 C66.2 C67.2 C68.2 C69.2 C70.2 C71.2 C72.2 C73.2 C83.2 C84.2 C94.2 C95.2 C104.2 C105.2 C106.2 C119.2 C121.2 C137.1 C139.2 C165.1 C168.1 C169.2 C170.1 C172.2 C183.1 C184.1 C185.1 D1.A GPIO-1.3 GPIO-2.3 GPIO-3.3 GPIO-4.1 L1.2 L2.2 L4.1 L15.2 LAN.AG LCD_CON.3 R15.1 R16.2 R17.1 R18.1 R20.1 R23.2 R26.2 R27.2 R42.1 R43.2 R44.2 R45.2 R46.2 R49.2 R62.2 R64.2 R71.1 RM1.1.2 RM1.3.2 RM2.1.1 RM4.1.1 RM4.2.1 RM4.3.1 RM4.4.1 RM5.1.2 RM5.2.2 RM5.4.2 U2.37 U2.38 U2.39 U2.41 U2.44 U3.8 U4.12 U4.37 U7.AB19 U7.H8 U7.H9 U7.H10 U7.H15 U7.H19 U7.J8 U7.J9 U7.J10 U7.J14 U7.J19 U7.L15 U7.L16 U7.N19 U7.P16 U7.T13 U7.W12 U7.W13 U7.W14 U7.W15 U7.W16 VR1.1 VR1.3
VCC/2: 1.2V_CPU.1 C48.2 C49.2 C50.2 C51.2 C52.2 C53.2 C142.1 C143.1 L11.2 U7.H11 U7.H12 U7.H13 U7.H14 U7.J12 U7.J13 U12.10
VCCINT: 1.2V_INT.1 C15.2 C16.2 C17.2 C18.2 C28.2 C29.2 C30.2 C31.2 C32.2 C33.2 C34.2 C35.2 C36.2 C37.2 C122.2 C123.2 C146.1 C147.1 C155.2 C156.2 L12.2 U7.J15 U7.J16 U7.K9 U7.K10 U7.K15 U7.K16 U7.L8 U7.L9 U7.M8 U7.M15 U7.M16 U7.N9 U7.P9 U7.R9 U7.R10 U7.T8 U12.17
VDD: 2.5V.1 C151.2 C152.2 C162.1 C164.2 C166.1 C167.1 U7.N15 U7.N16 U7.W17 VR1.5
VDD_RTC: C92.2 C93.2 C153.1 U7.K8 U12.28
VGA-B: GPIO-1.22 U7.AB16
VGA-G: GPIO-1.20 U7.AC16
VGA-R: GPIO-1.24 U7.AC17
VINT: C150.2 U12.26
VMIC: GPIO-1.12 U7.AA21
VPP [PWR]: 3.0VA.1 C97.2 C158.1 R10.1 U7.T19 U12.12 U13.1
WEN: U1.L3 U7.T3
XTALI: C90.2 Q3.2 U7.N23
XTALI1: C63.2 Q1.2 U2.46
XTALO: C91.2 Q3.1 U7.N22
XTALO1: C64.2 Q1.1 U2.47

## Tracks (layer width: path | path; a pad name or v marks a point on that pad's centre or on a via)
5VEXT  (via drill 0.6)
  Top 0.203: U12.32 65.75,41 65.96,41 66.15,41 U12.33
  Top 0.508: 74.3,52.2 74.3,56.39 R65.1
  Top 0.61: v66.22,40.26 65.96,40.51 65.96,41
  Top 1.016: 72.45,52.2 72.45,52.9 C174.+ | 72.45,52.2 FET2.1 | PWR_JACK.+ 74.3,52.2 72.45,52.2
  Route14 0.813: v66.22,40.26 66.22,41.2
  Route14 1.016: 66.22,41.2 66.22,41.71 68.58,44.07 68.58,46.23 69.85,47.5 73.02,47.5 74.04,48.51 74.04,49.78 74.3,50.04 PWR_JACK.+
  Bottom 0.254: D3.A 5VEXT.1
  Bottom 0.508: 69.98,53.47 5V_E.1
  Bottom 0.61: v66.22,40.26 66.55,39.93 C132.2
  Bottom 0.762: 69.98,53.47 69.98,54.61 C174.+
  Bottom 1.016: 72.26,54.99 74.3,54.99 PWR_JACK.+ 74.3,50.42 77.6,50.42 D4.C | 72.26,54.99 D3.A | 72.26,54.99 C174.+
+5V  (via drill 0.4, 0.6)
  Top 0.61: v33.66,57.28 LCD_CON.1 | v26.04,50.8 GPIO-1.1 | v33.66,3.94 GPIO-3.1 | v26.04,10.29 GPIO-2.1
  Top 0.889: v69.98,50.93 69.98,51.71 FET2.2
  Top 1.016: 13.33,33.02 R30.2 | 13.33,33.02 v13.33,34.42 v11.68,36.07 v11.68,37.08 | 13.33,33.02 R31.2 | v79.25,27.43 v79.25,19.3